# EAGLE board PT_2018_PB_4lyr_Rev1 (EAGLE 6.5.0)
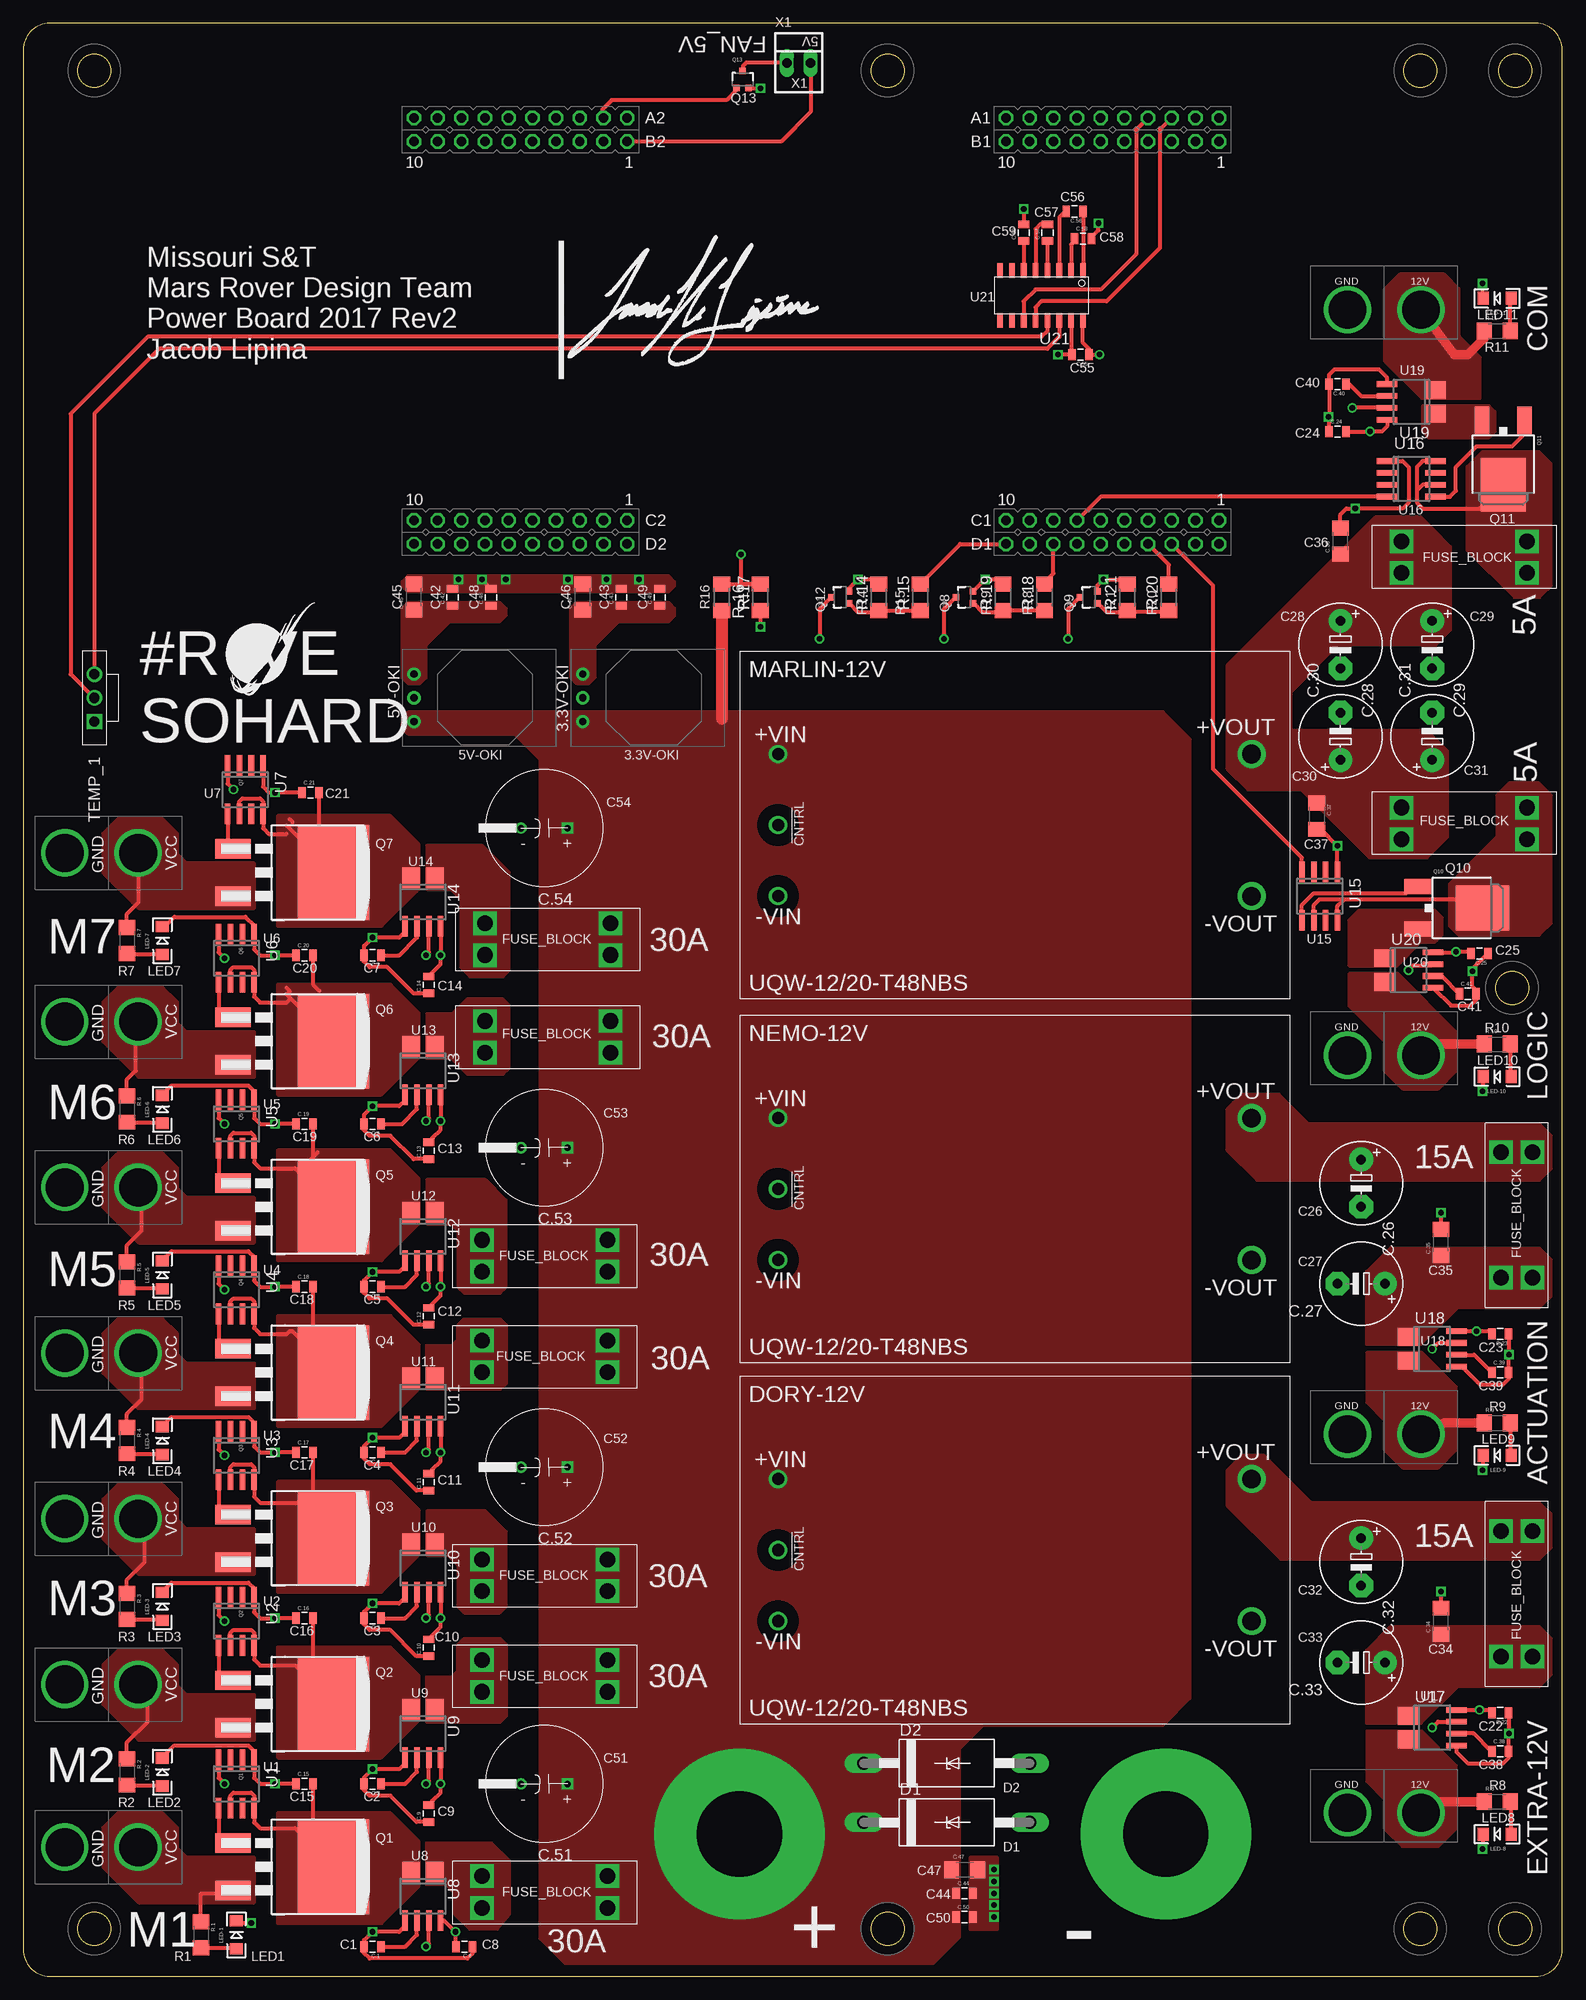
[diagram p0: board, top side]
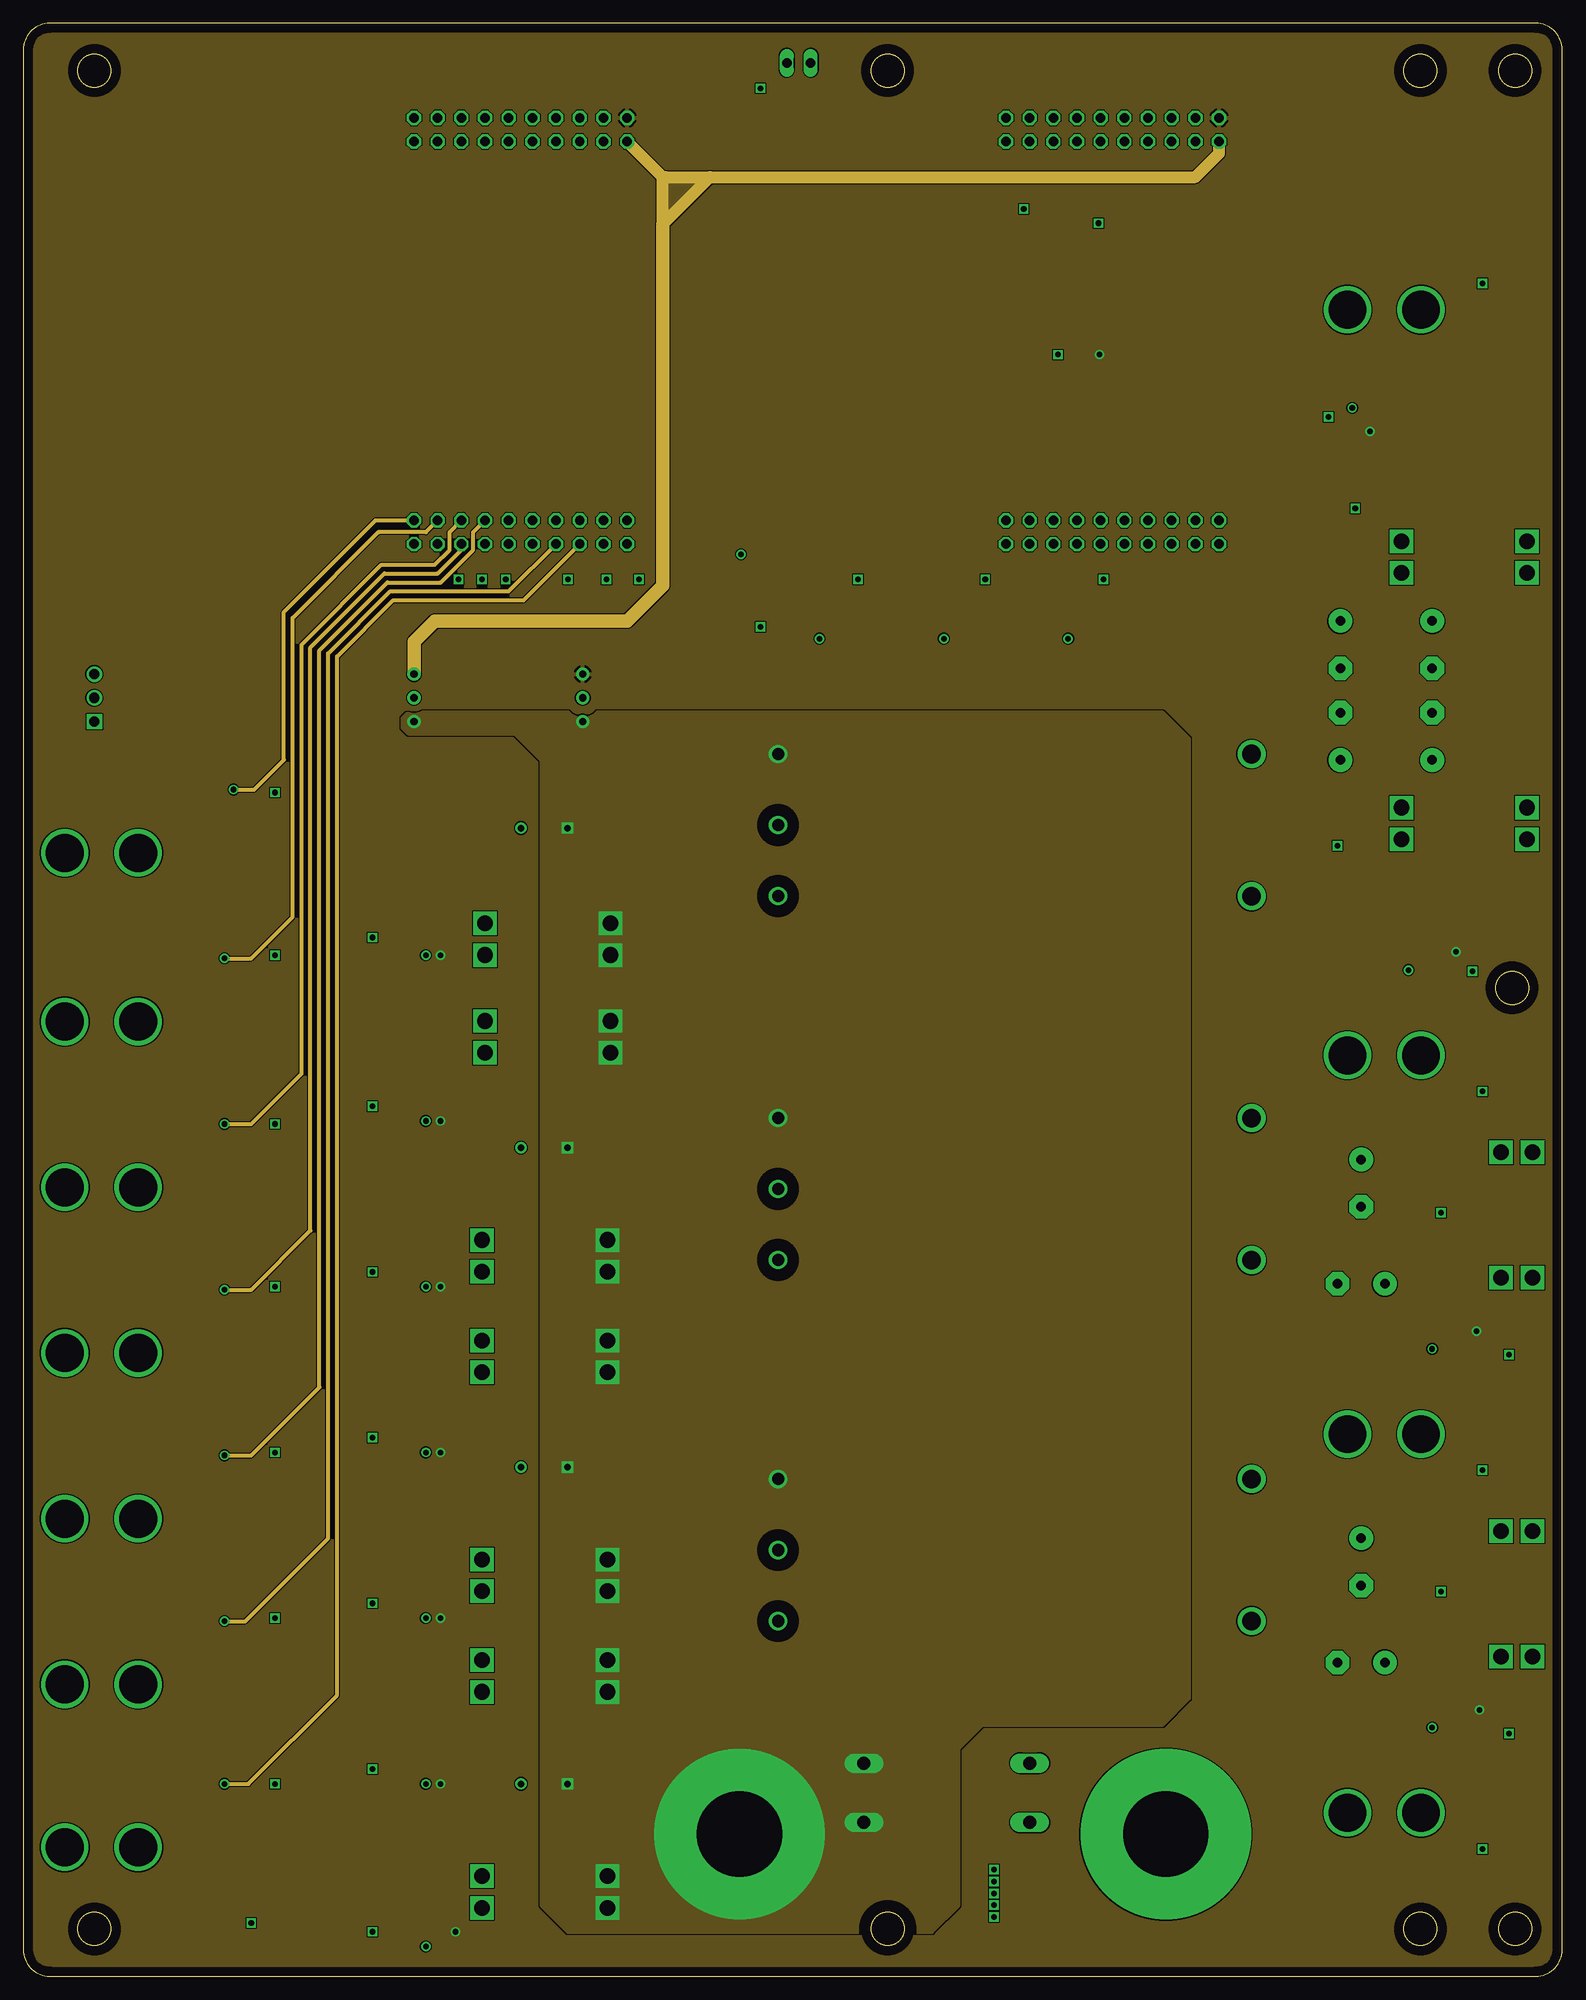
[diagram p1: board, inner layer Top-Mid(3.3)]
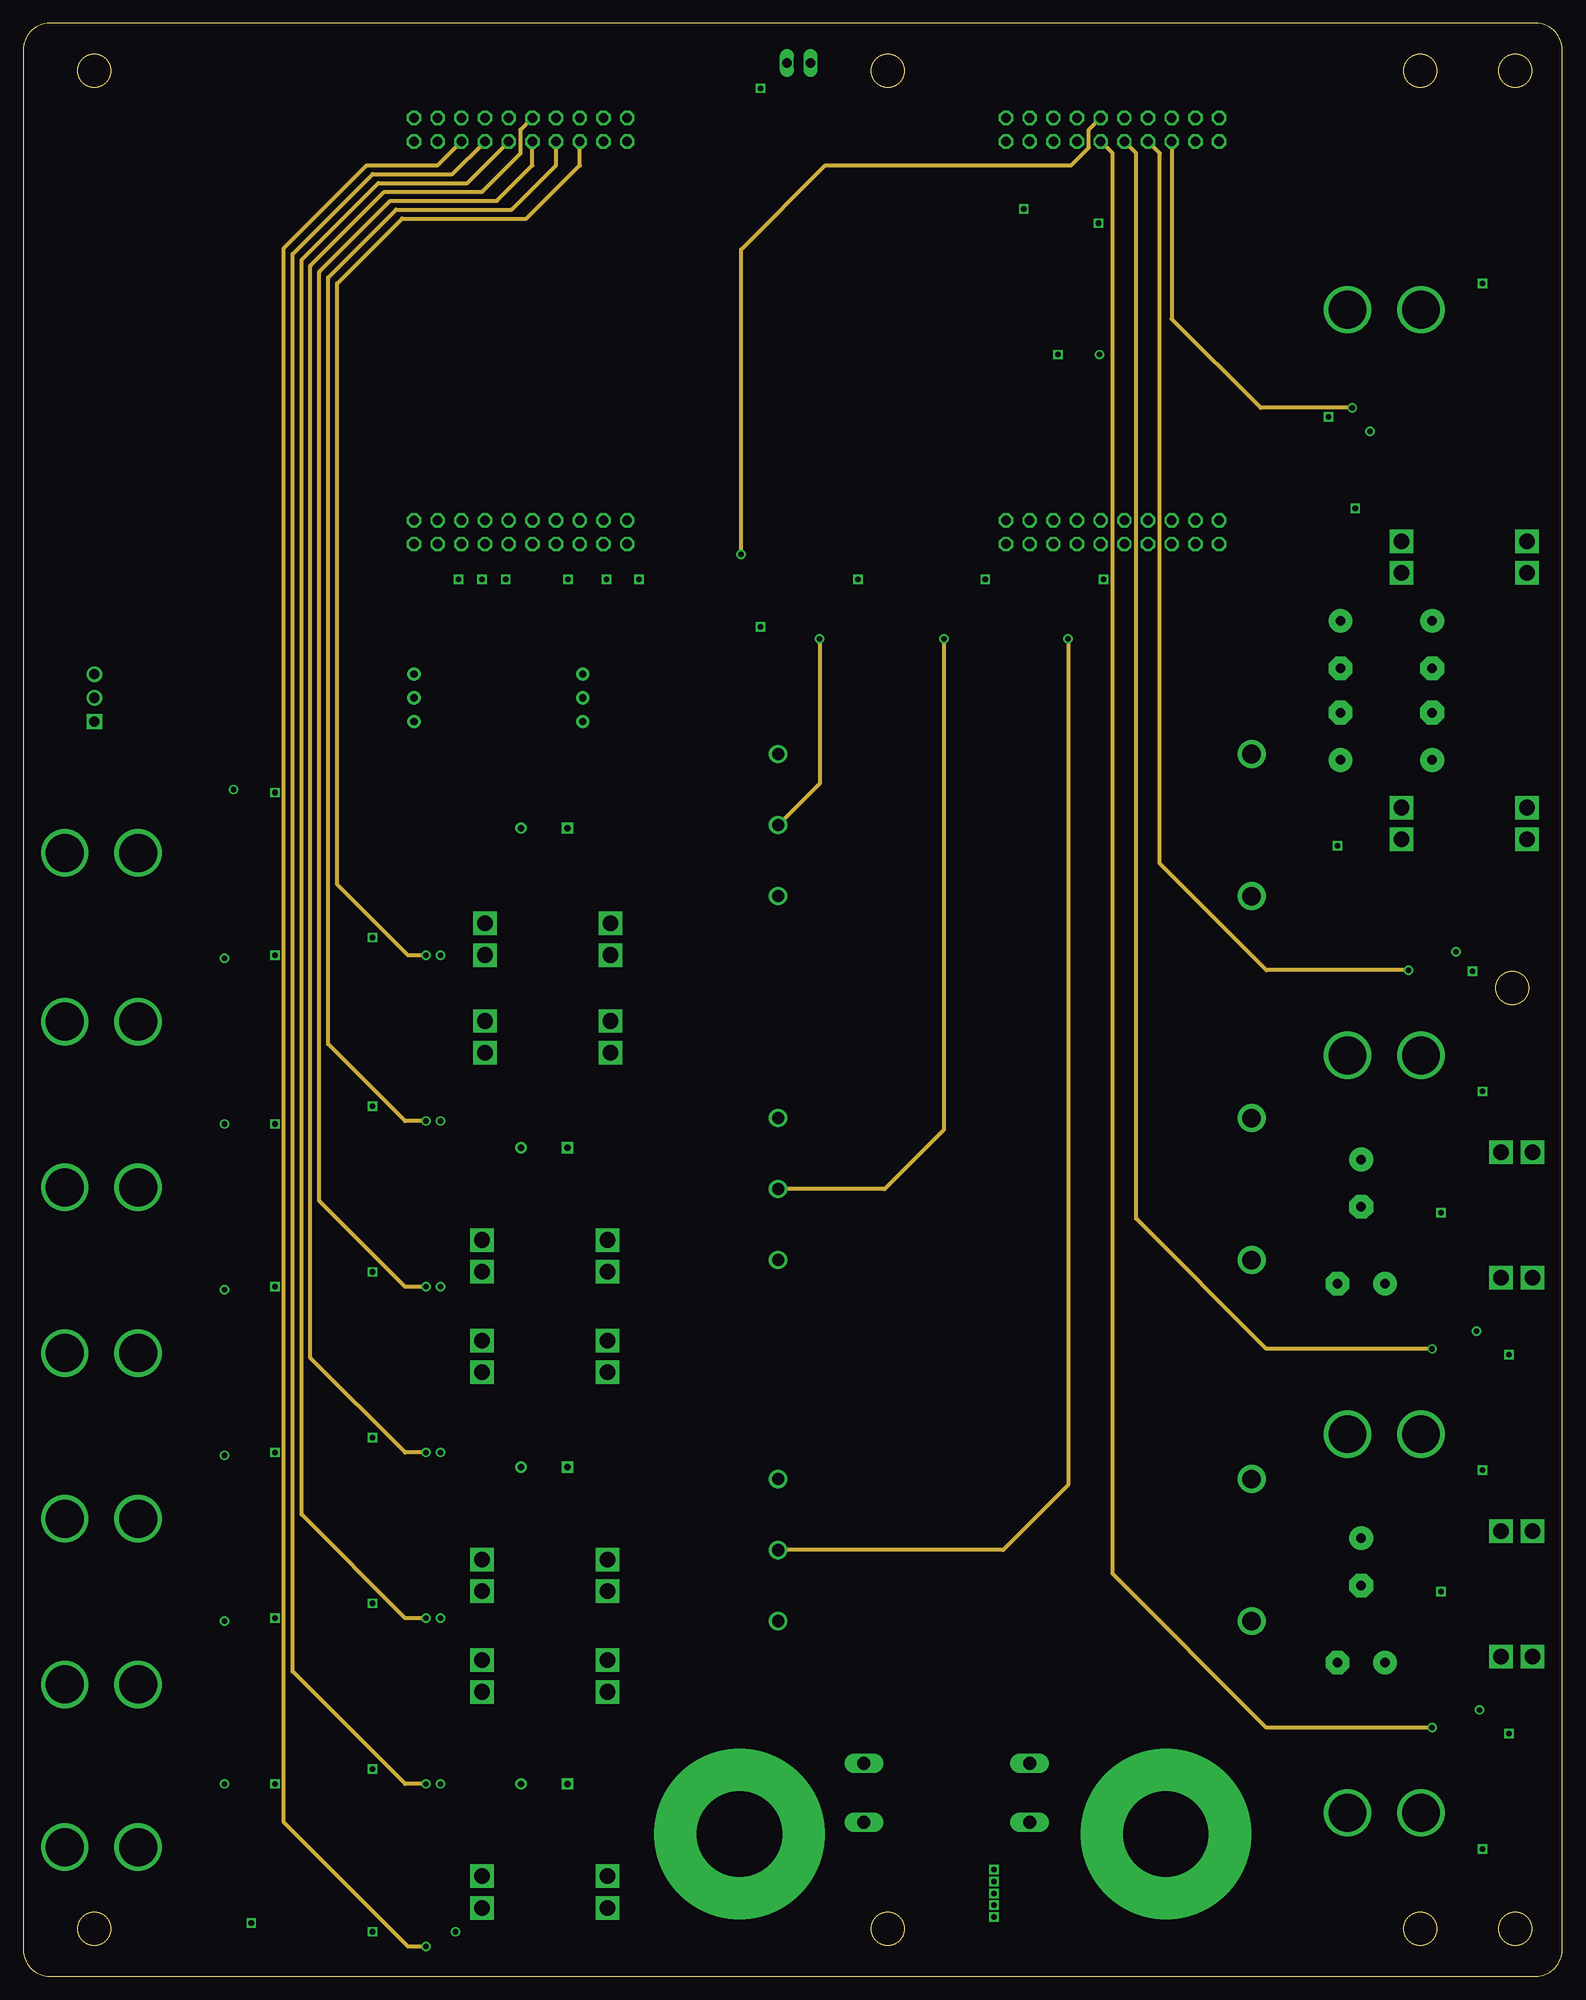
[diagram p2: board, inner layer Bot-Mid(sig)]
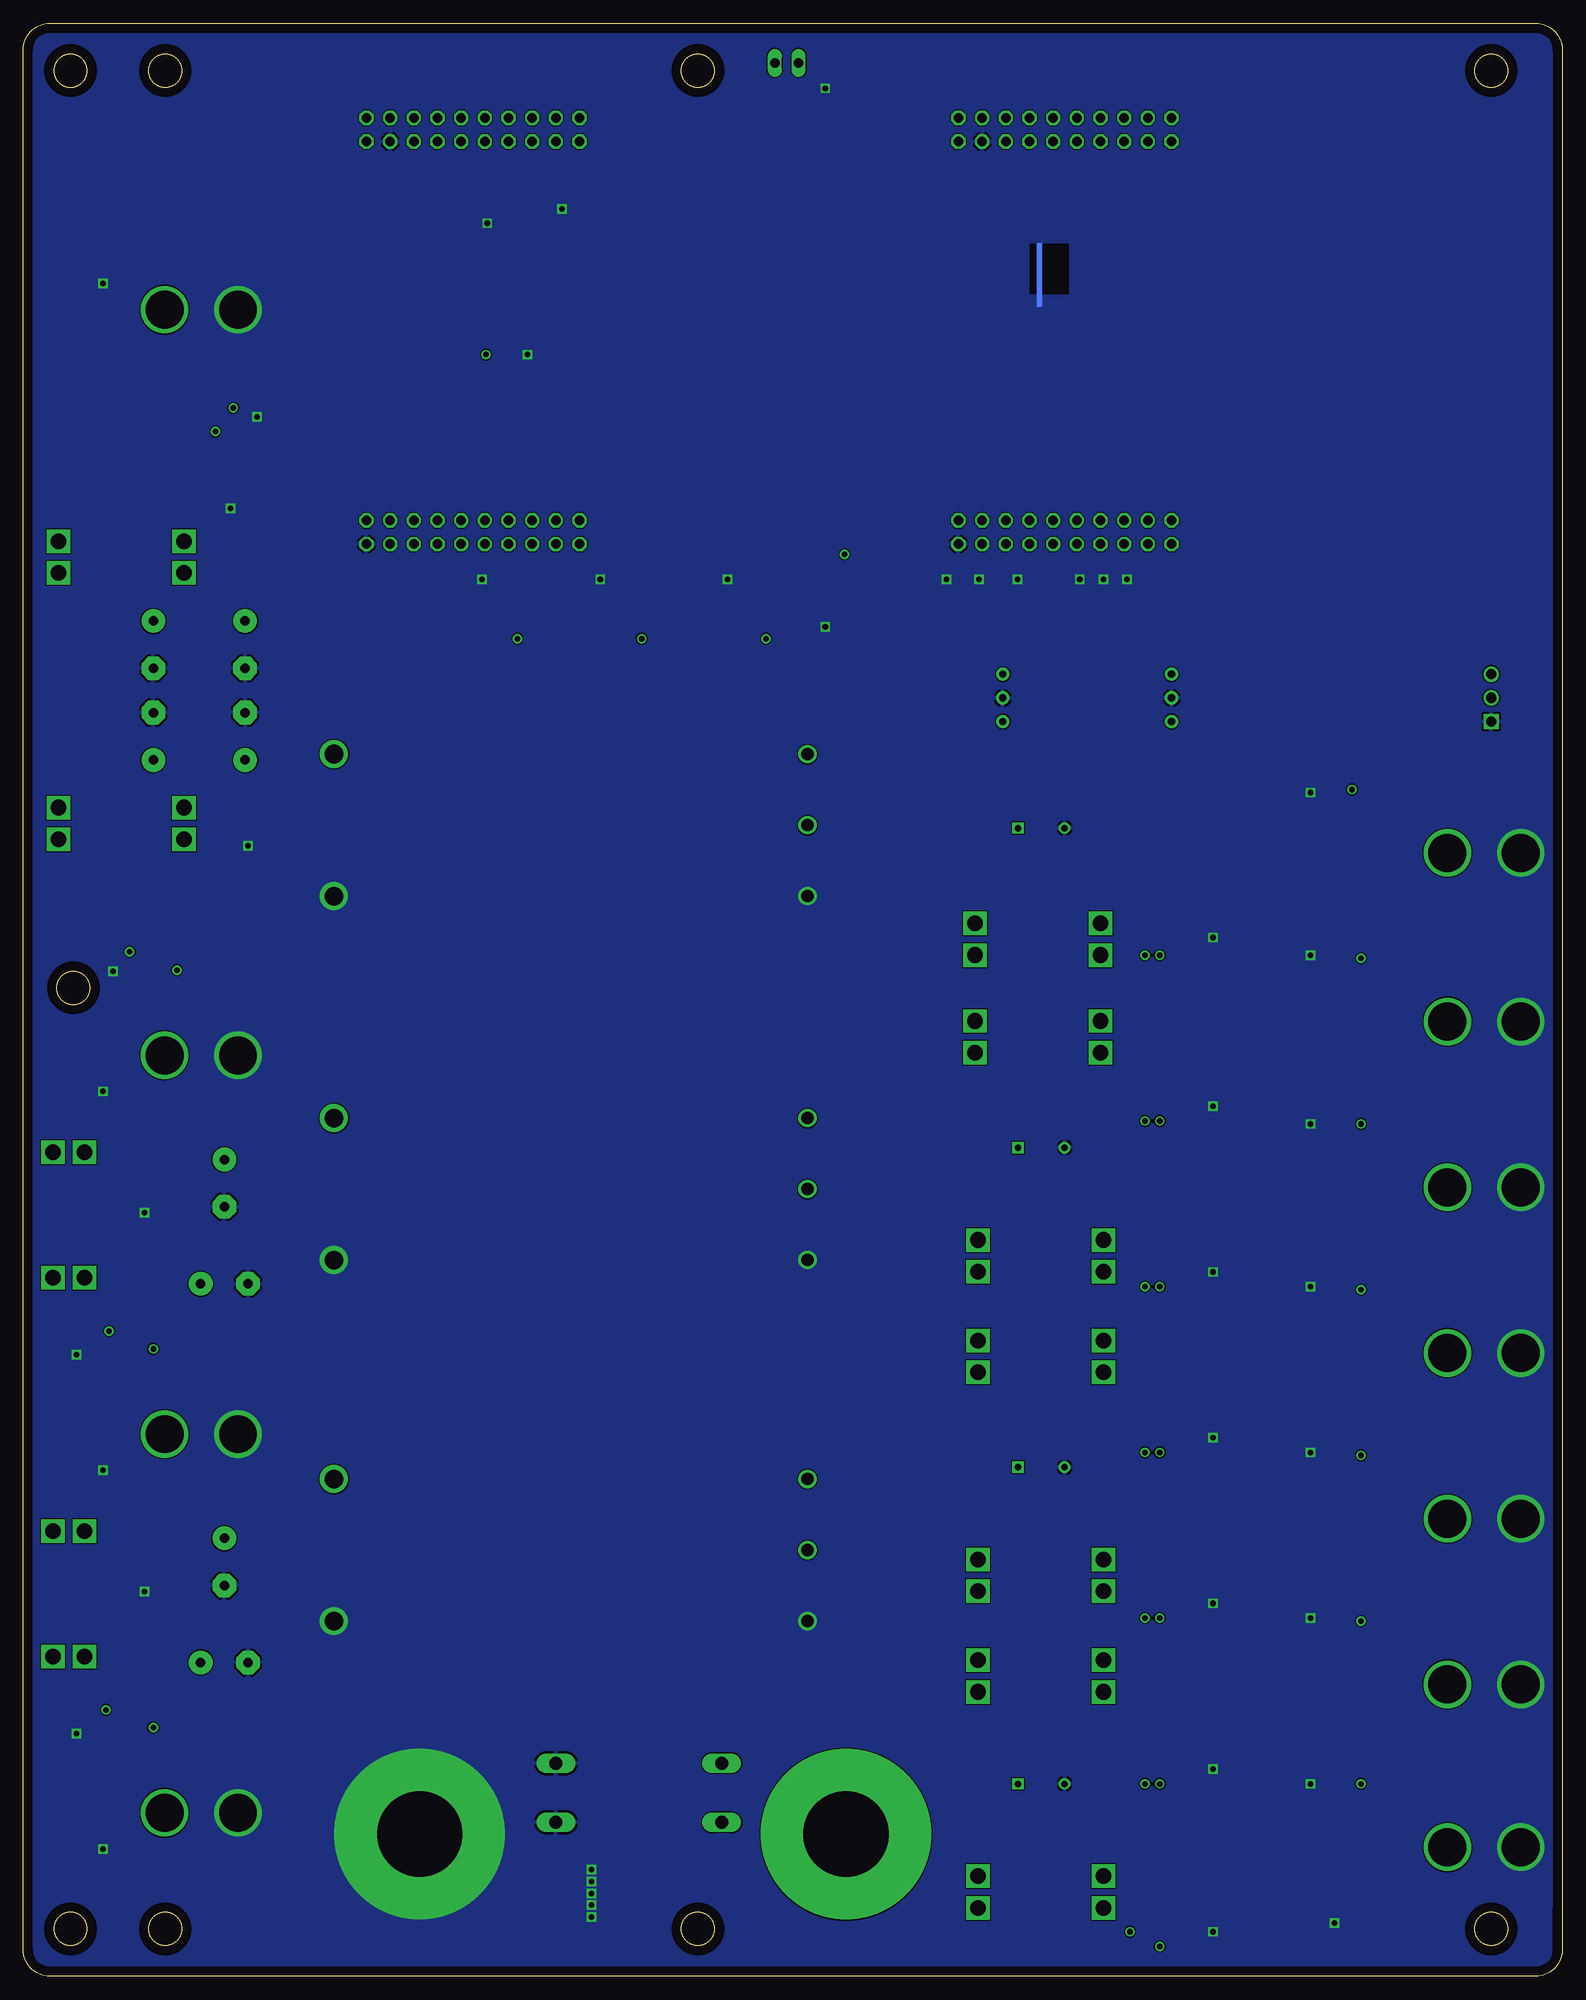
[diagram p3: board, bottom side, seen from below]

Size 165.08 x 209.54 mm. Coordinates in mm from the lower left corner, seen from the top.
Outline: 162.26,209.54 2.83,209.54 arc90 0,206.7 0,2.84 arc90 2.84,0 162.25,0 arc90 165.08,2.83 165.08,206.72 arc90 162.26,209.54
Copper layers (1*2*15*16): Top 0.035mm / dielectric 1.5mm / Top-Mid(3.3) 0.035mm / dielectric 0.15mm / Bot-Mid(sig) 0.035mm / dielectric 0.2mm / Bottom-GND 0.035mm
Design rules "advanced_circuits_standard *": minimum track width 5mil, minimum drill 10mil, track to track 5mil, track to pad 5mil, pad to pad 5mil, via to via 5mil, smd to smd 5mil, copper to edge 40mil, drill to drill 5mil, minimum pad ring 10mil, minimum via ring 8mil, stop-mask expansion 4mil, vias tented up to drill 0mil, thermal gap 10mil

## Footprints (pad centres in the part's own frame; a part is rotated, then mirrored left to right if it is on the bottom)
OKI-78SR_HORIZ = drill 0.762 pad 1.422: 1 0,0; 2 -2.54,0; 3 -5.08,0
LARGE_TERMINAL_HOLE = drill 9.144 pad 18.288: P$1 0,0
0805 = smd 0.8 x 1.2: 1 -0.9,0; 2 0.9,0
E5-8,5 = drill 1.016 pad 2.54: + -2.54,0 | drill 1.016 pad 2.54 octagon: - 2.54,0
1206 = smd 1.6 x 1.8: 1 -1.4,0; 2 1.4,0
C_12.5MM = drill 0.7 square: + -2.5,0 | drill 0.7: - 2.5,0
CB429-17 = drill 1.397 long: A 8.89,0; C -8.89,0
U-T48-QB-NO_TRIM = drill 1.3: 1 -25.4,7.62; 2 -25.4,0; 3 -25.4,-7.62 | drill 2: 4 25.4,-7.62; 8 25.4,7.62
APP45_12V_VERT_CONFIG = drill 4.064: GND 4.699,3.937; VCC 4.699,11.811
LED-1206 = smd 1.2 x 1.4: A -1.5,0; C 1.5,0
D2PACK = smd 2.083 x 3.81: 1 2.54,-4.191; 2 7.62,-4.191 | smd 10.16 x 7.62: TAB 5.08,6.604
SOT323 = smd 0.7 x 0.7: 1 -0.65,-0.925; 2 0.65,-0.925; 3 0,0.925
DPAK = smd 1.6 x 3: 1 -2.28,-5.31; 3 2.28,-5.31 | smd 4.826 x 5.715: 4 0,1.588
R1206 = smd 1.6 x 1.803: 1 -1.422,0; 2 1.422,0
MOLEX-70543-0002 = drill 1.1 square: 1 2.54,0 | drill 1.1: 2 0,0; 3 -2.54,0
SO8 = smd 0.6 x 2.2: 1 -1.905,-2.6; 2 -0.635,-2.6; 3 0.635,-2.6; 4 1.905,-2.6; 5 1.905,2.6; 6 0.635,2.6; 7 -0.635,2.6; 8 -1.905,2.6
SOIC8_ACS711 = smd 1.92 x 2.2: 1 -1.27,-2.6; 4 1.27,-2.6 | smd 0.6 x 2.2: 5 1.905,2.6; 6 0.635,2.6; 7 -0.635,2.6; 8 -1.905,2.6
SOIC16 = smd 0.6 x 1.55: 1 -4.445,-2.7; 2 -3.175,-2.7; 3 -1.905,-2.7; 4 -0.635,-2.7; 5 0.635,-2.7; 6 1.905,-2.7; 7 3.175,-2.7; 8 4.445,-2.7; 9 4.445,2.7; 10 3.175,2.7; 11 1.905,2.7; 12 0.635,2.7; 13 -0.635,2.7; 14 -1.905,2.7; 15 -3.175,2.7; 16 -4.445,2.7
TIVA-C-CONNECTED = drill 1.016 octagon: +3V3_1 59.69,54.61; +3V3_2 123.19,54.61; +5V_1 59.69,52.07; +5V_2 123.19,52.07; GND_1 57.15,52.07; GND_2 59.69,8.89; GND_3 120.65,52.07; GND_4 123.19,8.89; PA4 39.37,52.07; PA5 36.83,52.07; PA6 105.41,52.07; PA7 52.07,8.89; PB2 102.87,54.61; PB3 100.33,54.61; PB4 54.61,52.07; PB5 52.07,52.07; PC4 118.11,54.61; PC5 115.57,54.61; PC6 113.03,54.61; PC7 105.41,54.61; PD0 107.95,8.89; PD1 110.49,8.89; PD2 57.15,54.61; PD3 107.95,54.61; PD4 49.53,54.61; PD5 46.99,54.61; PD7 107.95,52.07; PE0 118.11,52.07; PE1 115.57,52.07; PE2 113.03,52.07; PE3 110.49,52.07; PE4 120.65,54.61; PE5 110.49,54.61; PF1 123.19,11.43; PF2 120.65,11.43; PF3 118.11,11.43; PG0 115.57,11.43; PG1 59.69,11.43; PH0 44.45,11.43; PH1 41.91,11.43; PH2 118.11,8.89; PH3 115.57,8.89; PK0 49.53,52.07; PK1 46.99,52.07; PK2 44.45,52.07; PK3 41.91,52.07; PK4 57.15,11.43; PK5 54.61,11.43; PK6 39.37,11.43; PK7 36.83,11.43; PL0 107.95,11.43; PL1 105.41,11.43; PL2 102.87,11.43; PL3 100.33,11.43; PL4 113.03,11.43; PL5 110.49,11.43; PM0 52.07,11.43; PM1 49.53,11.43; PM2 46.99,11.43; PM3 120.65,8.89; PM4 102.87,52.07; PM5 100.33,52.07; PM6 36.83,8.89; PM7 57.15,8.89; PN2 105.41,8.89; PN3 102.87,8.89; PN4 36.83,54.61; PN5 39.37,54.61; PP0 54.61,54.61; PP1 52.07,54.61; PP2 100.33,8.89; PP3 41.91,8.89; PP4 41.91,54.61; PP5 54.61,8.89; PQ0 44.45,54.61; PQ1 39.37,8.89; PQ2/PA3 46.99,8.89; PQ3/PA2 44.45,8.89; RST1 49.53,8.89; RST_2 113.03,8.89
APP45_MOCO_VERT_CONFIG = drill 4.064: GND 3.937,3.175; VCC 3.937,11.049
BLOCK_3557-2 = drill 1.676 square: IN_1 16.637,-1.651; IN_2 16.637,-5.055; OUT_1 3.175,-1.651; OUT_2 3.175,-5.055
22-23-2021 = drill 1 long: 1 -1.27,0; 2 1.27,0

## Placement (x,y rotation side)
3.3V-OKI  Q_OKI-78SR  [OKI-78SR_HORIZ]  60.01,134.62 270 top
5V-OKI  Q_OKI-78SR  [OKI-78SR_HORIZ]  41.91,134.62 270 top
BATT-NEG  TERMINAL_HOLE  [LARGE_TERMINAL_HOLE]  122.56,15.24 90 top
BATT-POS  TERMINAL_HOLE  [LARGE_TERMINAL_HOLE]  76.84,15.24 0 top
C.1  1nF  [0805]  37.46,3.17 180 top
C.2  1nF  [0805]  37.46,20.64 180 top
C.3  1nF  [0805]  37.46,38.42 180 top
C.4  1nF  [0805]  37.46,56.2 180 top
C.5  1nF  [0805]  37.46,73.98 180 top
C.6  1nF  [0805]  37.46,91.44 180 top
C.7  1nF  [0805]  37.46,109.54 180 top
C.8  .1µF  [0805]  47.31,3.17 180 top
C.9  .1µF  [0805]  43.5,17.46 90 top
C.10  .1µF  [0805]  43.5,35.24 90 top
C.11  .1µF  [0805]  43.5,53.02 90 top
C.12  .1µF  [0805]  43.5,70.8 90 top
C.13  .1µF  [0805]  43.5,88.58 90 top
C.14  .1µF  [0805]  43.5,106.36 90 top
C.15  .1µF  [0805]  30.16,20.64 0 top
C.16  .1µF  [0805]  30.16,38.42 0 top
C.17  .1µF  [0805]  30.16,56.2 0 top
C.18  .1µF  [0805]  30.16,73.98 0 top
C.19  .1µF  [0805]  30.16,91.44 0 top
C.20  .1µF  [0805]  30.16,109.54 0 top
C.21  .1µF  [0805]  30.8,127 0 top
C.22  .1µF  [0805]  158.43,28.26 180 top
C.23  .1µF  [0805]  158.43,68.9 180 top
C.24  .1µF  [0805]  140.97,165.74 0 top
C.25  .1µF  [0805]  156.21,109.73 180 top
C.26  330µF  [E5-8,5]  143.51,85.09 270 top
C.27  330µF  [E5-8,5]  143.51,74.3 180 top
C.28  330µF  [E5-8,5]  141.29,142.88 270 top
C.29  330µF  [E5-8,5]  151.13,142.88 270 top
C.30  330µF  [E5-8,5]  141.29,133.03 90 top
C.31  330µF  [E5-8,5]  151.13,133.03 90 top
C.32  330µF  [E5-8,5]  143.51,44.45 270 top
C.33  330µF  [E5-8,5]  143.51,33.66 180 top
C.34  2.2uF  [1206]  152.08,38.1 90 top
C.35  2.2uF  [1206]  152.08,78.74 90 top
C.36  2.2uF  [1206]  141.29,153.99 90 top
C.37  2.2uF  [1206]  138.75,124.46 270 top
C.38  1nF  [0805]  158.43,24.13 0 top
C.39  1nF  [0805]  158.43,64.77 0 top
C.40  1nF  [0805]  140.97,170.81 180 top
C.41  1nF  [0805]  154.94,105.41 0 top
C.42  1nF  [0805]  46.04,147.96 90 top
C.43  1nF  [0805]  64.14,147.96 90 top
C.44  1nF  [0805]  100.97,8.89 0 top
C.45  10uF  [1206]  41.91,147.96 90 top
C.46  10uF  [1206]  60.01,147.96 90 top
C.47  10uF  [1206]  100.97,11.43 0 top
C.48  .1uF  [0805]  50.16,147.96 90 top
C.49  .1uF  [0805]  68.26,147.96 90 top
C.50  .1uF  [0805]  100.97,6.35 0 top
C.51  1mF  [C_12.5MM]  55.88,20.64 180 top
C.52  1mF  [C_12.5MM]  55.88,54.61 180 top
C.53  1mF  [C_12.5MM]  55.88,88.9 180 top
C.54  1mF  [C_12.5MM]  55.88,123.19 180 top
C.55  .1u  [0805]  113.41,173.99 180 top
C.56  .1u  [0805]  112.78,189.36 180 top
C.57  .1u  [0805]  109.86,187.07 90 top
C.58  .1u  [0805]  113.67,186.44 0 top
C.59  .1u  [0805]  107.32,187.07 90 top
D1  1.5KE36A  [CB429-17]  99.06,16.51 0 top
D2  1.5KE36A  [CB429-17]  99.06,22.86 0 top
DORY-12V  UQW-12/20-T48NBS  [U-T48-QB-NO_TRIM]  106.36,45.72 0 top
J1  APP_2POS_CONFIG12V_VERT  [APP45_12V_VERT_CONFIG]  138.11,103.5 270 top
J2  APP_2POS_CONFIG12V_VERT  [APP45_12V_VERT_CONFIG]  138.11,183.51 270 top
J3  APP_2POS_CONFIG12V_VERT  [APP45_12V_VERT_CONFIG]  138.11,62.87 270 top
J4  APP_2POS_CONFIG12V_VERT  [APP45_12V_VERT_CONFIG]  138.11,22.23 270 top
LED-1  [LED-1206]  22.86,4.45 90 top
LED-2  [LED-1206]  14.92,21.91 90 top
LED-3  [LED-1206]  14.92,39.69 90 top
LED-4  [LED-1206]  14.92,57.47 90 top
LED-5  [LED-1206]  14.92,75.25 90 top
LED-6  [LED-1206]  14.92,93.03 90 top
LED-7  [LED-1206]  14.92,111.12 90 top
LED-8  [LED-1206]  158.11,15.24 180 top
LED-9  [LED-1206]  158.11,55.88 180 top
LED-10  [LED-1206]  158.11,96.52 180 top
LED-11  [LED-1206]  158.11,180.02 180 top
MARLIN-12V  UQW-12/20-T48NBS  [U-T48-QB-NO_TRIM]  106.36,123.51 0 top
NEMO-12V  UQW-12/20-T48NBS  [U-T48-QB-NO_TRIM]  106.36,84.45 0 top
Q1  Q_IRFS7437PbF  [D2PACK]  26.67,16.83 270 top
Q2  Q_IRFS7437PbF  [D2PACK]  26.67,34.29 270 top
Q3  Q_IRFS7437PbF  [D2PACK]  26.67,52.07 270 top
Q4  Q_IRFS7437PbF  [D2PACK]  26.67,69.85 270 top
Q5  Q_IRFS7437PbF  [D2PACK]  26.67,87.63 270 top
Q6  Q_IRFS7437PbF  [D2PACK]  26.67,105.41 270 top
Q7  Q_IRFS7437PbF  [D2PACK]  26.67,123.51 270 top
Q8  2N7002  [SOT323]  100.97,147.96 90 top
Q9  2N7002  [SOT323]  114.3,147.96 90 top
Q10  MOSFET-NCHANNELFDD8780  [DPAK]  154.94,114.62 270 top
Q11  MOSFET-NCHANNELFDD8780  [DPAK]  158.75,161.61 180 top
Q12  2N7002  [SOT323]  87.63,147.96 90 top
Q13  2N7002PW  [SOT323]  77.15,203.52 0 top
R.1  5kΩ  [1206]  19.05,4.45 270 top
R.2  5kΩ  [1206]  11.11,21.91 270 top
R.3  5kΩ  [1206]  11.11,39.69 270 top
R.4  5kΩ  [1206]  11.11,57.47 270 top
R.5  5kΩ  [1206]  11.11,75.25 270 top
R.6  5kΩ  [1206]  11.11,93.03 270 top
R.7  5kΩ  [1206]  11.11,111.12 270 top
R.8  1kΩ  [1206]  158.11,18.73 0 top
R.9  1kΩ  [1206]  158.11,59.37 0 top
R.10  1kΩ  [1206]  158.11,100.01 0 top
R.11  1kΩ  [1206]  158.11,176.53 0 top
R.14  100k  [R1206]  91.76,147.96 90 top
R.15  1k  [R1206]  96.2,147.96 90 top
R.16  100k 1%  [R1206]  74.93,147.96 270 top
R.17  10kΩ 1%  [R1206]  79.06,147.96 90 top
R.18  1k  [R1206]  109.54,147.96 90 top
R.19  100k  [R1206]  105.09,147.96 90 top
R.20  1k  [R1206]  122.87,147.96 90 top
R.21  100k  [R1206]  118.43,147.96 90 top
TEMP_1  SL03  [MOLEX-70543-0002]  7.62,137.16 270 top
U1  LT1910  [SO8]  22.86,20.64 180 top
U2  LT1910  [SO8]  22.86,38.1 180 top
U3  LT1910  [SO8]  22.86,55.88 180 top
U4  LT1910  [SO8]  22.86,73.66 180 top
U5  LT1910  [SO8]  22.86,91.44 180 top
U6  LT1910  [SO8]  22.86,109.22 180 top
U7  LT1910  [SO8]  23.81,127.32 180 top
U8  ACS722LLCTR-40AU-T  [SOIC8_ACS711]  42.86,8.57 180 top
U9  ACS722LLCTR-40AU-T  [SOIC8_ACS711]  42.86,26.04 180 top
U10  ACS722LLCTR-40AU-T  [SOIC8_ACS711]  42.86,43.81 180 top
U11  ACS722LLCTR-40AU-T  [SOIC8_ACS711]  42.86,61.59 180 top
U12  ACS722LLCTR-40AU-T  [SOIC8_ACS711]  42.86,79.38 180 top
U13  ACS722LLCTR-40AU-T  [SOIC8_ACS711]  42.86,97.16 180 top
U14  ACS722LLCTR-40AU-T  [SOIC8_ACS711]  42.86,115.25 180 top
U15  LT1910  [SO8]  139.06,115.89 180 top
U16  LT1910  [SO8]  148.91,160.66 270 top
U17  ACS722LLCTR-40AU-T  [SOIC8_ACS711]  151.13,26.67 270 top
U18  ACS722LLCTR-40AU-T  [SOIC8_ACS711]  151.13,67.31 270 top
U19  ACS722LLCTR-40AU-T  [SOIC8_ACS711]  148.91,168.91 90 top
U20  ACS722LLCTR-40AU-T  [SOIC8_ACS711]  148.59,107.95 270 top
U21  MAX3232D  [SOIC16]  109.22,180.34 180 top
U$1  TIVA-C-CONNECTED  [TIVA-C-CONNECTED]  5.08,144.78 0 top
U$2  JACOB_SIG  [JACOB_SIG]  56.71,170.05 0 top
U$3  APP_2POS_CONFIGMOCO_VERT  [APP45_MOCO_VERT_CONFIG]  1.27,17.78 270 top
U$5  MOUNTING_HOLE#6  [#6_SCREW]  160.02,5.08 0 top
U$7  APP_2POS_CONFIGMOCO_VERT  [APP45_MOCO_VERT_CONFIG]  1.27,53.02 270 top
U$8  MOUNTING_HOLE#6  [#6_SCREW]  149.86,204.47 0 top
U$9  MOUNTING_HOLE#6  [#6_SCREW]  159.7,106.05 0 top
U$10  MOUNTING_HOLE#6  [#6_SCREW]  7.62,204.47 0 top
U$14  ATC_FUSE_BLOCK  [BLOCK_3557-2]  156.84,31.11 90 top
U$15  APP_2POS_CONFIGMOCO_VERT  [APP45_MOCO_VERT_CONFIG]  1.27,70.8 270 top
U$16  MOUNTING_HOLE#6  [#6_SCREW]  160.02,204.47 0 top
U$19  APP_2POS_CONFIGMOCO_VERT  [APP45_MOCO_VERT_CONFIG]  1.27,88.58 270 top
U$20  APP_2POS_CONFIGMOCO_VERT  [APP45_MOCO_VERT_CONFIG]  1.27,106.36 270 top
U$22  APP_2POS_CONFIGMOCO_VERT  [APP45_MOCO_VERT_CONFIG]  1.27,124.46 270 top
U$23  APP_2POS_CONFIGMOCO_VERT  [APP45_MOCO_VERT_CONFIG]  1.27,35.24 270 top
U$26  ATC_FUSE_BLOCK  [BLOCK_3557-2]  46.04,12.38 0 top
U$27  ATC_FUSE_BLOCK  [BLOCK_3557-2]  46.04,35.56 0 top
U$28  ATC_FUSE_BLOCK  [BLOCK_3557-2]  46.35,114.62 0 top
U$29  ATC_FUSE_BLOCK  [BLOCK_3557-2]  46.35,104.14 0 top
U$30  ATC_FUSE_BLOCK  [BLOCK_3557-2]  156.84,71.75 90 top
U$31  ATC_FUSE_BLOCK  [BLOCK_3557-2]  164.47,148.91 180 top
U$32  ATC_FUSE_BLOCK  [BLOCK_3557-2]  164.47,120.33 180 top
U$34  MOUNTING_HOLE#6  [#6_SCREW]  92.71,5.08 0 top
U$35  MOUNTING_HOLE#6  [#6_SCREW]  92.71,204.47 0 top
U$36  ATC_FUSE_BLOCK  [BLOCK_3557-2]  46.04,46.35 0 top
U$37  ATC_FUSE_BLOCK  [BLOCK_3557-2]  46.04,69.85 0 top
U$38  ATC_FUSE_BLOCK  [BLOCK_3557-2]  46.04,80.64 0 top
U$39  MOUNTING_HOLE#6  [#6_SCREW]  7.62,5.08 0 top
U$40  MOUNTING_HOLE#6  [#6_SCREW]  149.86,5.08 0 top
U$41  MRDT_LOGO  [MRDT_LOGO]  21.72,136.59 0 top
X1  22-23-2021  [22-23-2021]  83.19,205.3 0 top

## Library data of the parts
3.3V-OKI 5V-OKI BATT-NEG BATT-POS DORY-12V MARLIN-12V NEMO-12V Q1-Q7 U8-U14 U17-U20 = MRDT-2015-PowerBoard
C.1-C.25 C.34-C.50 = SparkFun-Capacitors
C.26-C.33 R.14-R.21 = resistor
C.51-C.54 = MRDT-2014-All
C.55-C.59 R.1-R.11 = SparkFun-Passives
D1 D2 = diode
J1-J4 = MRDT-Connectors; COLOR1: YELLOW; COLOR2: BLACK
LED-1-LED-11 = SparkFun-LED
Q8 Q9 Q12 Q13 = SparkFun-DiscreteSemi; PROD_ID: TRANS-11151
Q10 Q11 = SparkFun-DiscreteSemi; PROD_ID: TRANS-09984
TEMP_1 = MRDT-Connectors
U1-U7 U15 U16 = Jake
U21 = MRDT-ICs; OPERATING_VOLTAGE: 3V3
U$1 U$41 = MRDT-2015-General
U$2 = Jacob Signature
U$3 U$7 U$15 U$19 U$20 U$22 U$23 = MRDT-Connectors; COLOR2: BLACK
U$5 U$8-U$10 U$14 U$16 U$26-U$32 U$34-U$40 = MRDT-Hardware
X1 = con-molex; MF: MOLEX; MPN: 22-23-2021; OC_FARNELL: 1462926; OC_NEWARK: 25C3832

## Nets
3.3V: 3.3V-OKI.3 C.8.2 C.9.2 C.10.2 C.11.2 C.12.2 C.13.2 C.14.2 C.22.2 C.23.2 C.24.2 C.25.2 C.43.1 C.46.1 C.49.1 C.55.1 U8.8 U9.8 U10.8 U11.8 U12.8 U13.8 U14.8 U17.8 U18.8 U19.8 U20.8 U21.16 U$1.+3V3_1 U$1.+3V3_2
5V: 5V-OKI.3 C.42.1 C.45.1 C.48.1 U$1.+5V_1 U$1.+5V_2 X1.2
12V-AUX-ACT: J3.VCC R.9.1 U18.4
12V-AUX-COM: J1.VCC R.10.1 U20.4
12V-AUX-EXTRA: J4.VCC R.8.1 U17.4
12V-AUX-LOGIC: J2.VCC R.11.1 U19.4
232_RX: TEMP_1.2 U21.13
232_TX: TEMP_1.3 U21.14
ACT-CTL: R.18.2 U$1.PN2
COM-SIG: U16.4 U$1.PL0
COM/LOGIC-CTL: R.15.2 U$1.PP2
DRAIN-M1: C.15.2 Q1.TAB U1.6 U1.8 U8.4
DRAIN-M2: C.16.2 Q2.TAB U2.6 U2.8 U9.4
DRAIN-M3: C.17.2 Q3.TAB U3.6 U3.8 U10.4
DRAIN-M4: C.18.2 Q4.TAB U4.6 U4.8 U11.4
DRAIN-M5: C.19.2 Q5.TAB U5.6 U5.8 U12.4
DRAIN-M6: C.20.2 Q6.TAB U6.6 U6.8 U13.4
DRAIN-M7: C.21.2 Q7.TAB U7.6 U7.8 U14.4
EXTRA-CTL: R.20.2 U$1.PH3
FAN_CTL_1: Q13.1 U$1.PD2
FILTER-M1: C.1.1 U8.6
FILTER-M2: C.2.1 U9.6
FILTER-M3: C.3.1 U10.6
FILTER-M4: C.4.1 U11.6
FILTER-M5: C.5.1 U12.6
FILTER-M6: C.6.1 U13.6
FILTER-M7: C.7.1 U14.6
GATE-M1: Q1.1 U1.5
GATE-M2: Q2.1 U2.5
GATE-M3: Q3.1 U3.5
GATE-M4: Q4.1 U4.5
GATE-M5: Q5.1 U5.5
GATE-M6: Q6.1 U6.5
GATE-M7: Q7.1 U7.5
GND: 3.3V-OKI.2 5V-OKI.2 BATT-NEG.P$1 C.1.2 C.2.2 C.3.2 C.4.2 C.5.2 C.6.2 C.7.2 C.8.1 C.9.1 C.10.1 C.11.1 C.12.1 C.13.1 C.14.1 C.15.1 C.16.1 C.17.1 C.18.1 C.19.1 C.20.1 C.21.1 C.22.1 C.23.1 C.24.1 C.25.1 C.26.- C.27.- C.28.- C.29.- C.30.- C.31.- C.32.- C.33.- C.34.2 C.35.2 C.36.2 C.37.2 C.38.2 C.39.2 C.40.2 C.41.2 C.42.2 C.43.2 C.44.2 C.45.2 C.46.2 C.47.2 C.48.2 C.49.2 C.50.2 C.51.- C.52.- C.53.- C.54.- C.55.2 C.58.2 C.59.2 D1.A D2.A DORY-12V.3 DORY-12V.4 J1.GND J2.GND J3.GND J4.GND LED-1.C LED-2.C LED-3.C LED-4.C LED-5.C LED-6.C LED-7.C LED-8.C LED-9.C LED-10.C LED-11.C MARLIN-12V.3 MARLIN-12V.4 NEMO-12V.3 NEMO-12V.4 Q8.2 Q9.2 Q12.2 Q13.2 R.14.2 R.17.1 R.19.2 R.21.2 TEMP_1.1 U1.1 U2.1 U3.1 U4.1 U5.1 U6.1 U7.1 U8.5 U9.5 U10.5 U11.5 U12.5 U13.5 U14.5 U15.1 U16.1 U17.5 U18.5 U19.5 U20.5 U21.15 U$1.GND_1 U$1.GND_2 U$1.GND_3 U$1.GND_4 U$3.GND U$7.GND U$15.GND U$19.GND U$20.GND U$22.GND U$23.GND
IMEAS-ACT: U18.7 U$1.PE2
IMEAS-COM: U19.7 U$1.PE0
IMEAS-EXTRA: U17.7 U$1.PE3
IMEAS-LOGIC: U20.7 U$1.PE1
IMEAS-M1: U8.7 U$1.PK3
IMEAS-M2: U9.7 U$1.PK2
IMEAS-M3: U10.7 U$1.PK1
IMEAS-M4: U11.7 U$1.PD4
IMEAS-M5: U12.7 U$1.PK0
IMEAS-M6: U13.7 U$1.PB5
IMEAS-M7: U14.7 U$1.PB4
LEDLINE-M1: LED-1.A R.1.2
LEDLINE-M2: LED-2.A R.2.2
LEDLINE-M3: LED-3.A R.3.2
LEDLINE-M4: LED-4.A R.4.2
LEDLINE-M5: LED-5.A R.5.2
LEDLINE-M6: LED-6.A R.6.2
LEDLINE-M7: LED-7.A R.7.2
LOGIC-SIG: U15.4 U$1.PH2
N$1: C.26.+ NEMO-12V.8 U$30.IN_1 U$30.IN_2
N$2: C.33.+ C.34.1 U17.1 U$14.OUT_1 U$14.OUT_2
N$3: MARLIN-12V.2 Q12.3
N$4: C.41.1 U20.6
N$5: DORY-12V.2 Q9.3
N$6: LED-9.A R.9.2
N$7: LED-11.A R.11.2
N$8: NEMO-12V.2 Q8.3
N$9: C.28.+ C.29.+ C.30.+ C.31.+ C.36.1 C.37.1 MARLIN-12V.8 U$31.IN_1 U$31.IN_2 U$32.IN_1 U$32.IN_2
N$10: C.38.1 U17.6
N$11: C.58.1 U21.2
N$12: C.39.1 U18.6
N$15: C.40.1 U19.6
N$16: LED-10.A R.10.2
N$17: Q11.1 U16.5
N$18: C.27.+ C.35.1 U18.1 U$30.OUT_1 U$30.OUT_2
N$19: Q11.3 U19.1
N$20: Q11.4 U16.6 U16.8 U$31.OUT_1 U$31.OUT_2
N$21: Q10.4 U15.6 U15.8 U$32.OUT_1 U$32.OUT_2
N$22: Q10.3 U20.1
N$23: C.32.+ DORY-12V.8 U$14.IN_1 U$14.IN_2
N$25: Q8.1 R.18.1 R.19.1
N$27: Q9.1 R.20.1 R.21.1
N$28: Q10.1 U15.5
N$40: C.56.1 U21.1
N$42: C.56.2 U21.3
N$43: C.57.1 U21.4
N$44: C.57.2 U21.5
N$45: C.59.1 U21.6
N$46: LED-8.A R.8.2
N$66: Q13.3 X1.1
N$114: Q12.1 R.14.1 R.15.1
SER_RX: U21.12 U$1.PC4
SER_TX: U21.11 U$1.PC5
SIG-M1: U1.4 U$1.PP5
SIG-M2: U2.4 U$1.PA7
SIG-M3: U3.4 U$1.PH0
SIG-M4: U4.4 U$1.PP3
SIG-M5: U5.4 U$1.PH1
SIG-M6: U6.4 U$1.PK6
SIG-M7: U7.4 U$1.PK7
SOURCE-M1: Q1.2 R.1.1 U$3.VCC
SOURCE-M2: Q2.2 R.2.1 U$23.VCC
SOURCE-M3: Q3.2 R.3.1 U$7.VCC
SOURCE-M4: Q4.2 R.4.1 U$15.VCC
SOURCE-M5: Q5.2 R.5.1 U$19.VCC
SOURCE-M6: Q6.2 R.6.1 U$20.VCC
SOURCE-M7: Q7.2 R.7.1 U$22.VCC
V_BATT: 3.3V-OKI.1 5V-OKI.1 BATT-POS.P$1 C.44.1 C.47.1 C.50.1 C.51.+ C.52.+ C.53.+ C.54.+ D1.C D2.C DORY-12V.1 MARLIN-12V.1 NEMO-12V.1 R.16.2 U$26.IN_1 U$26.IN_2 U$27.IN_1 U$27.IN_2 U$28.IN_1 U$28.IN_2 U$29.IN_1 U$29.IN_2 U$36.IN_1 U$36.IN_2 U$37.IN_1 U$37.IN_2 U$38.IN_1 U$38.IN_2
V_BATT_M1: U8.1 U$26.OUT_1 U$26.OUT_2
V_BATT_M2: U9.1 U$27.OUT_1 U$27.OUT_2
V_BATT_M3: U10.1 U$36.OUT_1 U$36.OUT_2
V_BATT_M4: U11.1 U$37.OUT_1 U$37.OUT_2
V_BATT_M5: U12.1 U$38.OUT_1 U$38.OUT_2
V_BATT_M6: U13.1 U$29.OUT_1 U$29.OUT_2
V_BATT_M7: U14.1 U$28.OUT_1 U$28.OUT_2
VMEAS-VBATT: R.16.1 R.17.2 U$1.PE5

## Tracks (layer width: path | path; a pad name or v marks a point on that pad's centre or on a via)
3.3V  (via drill 0.6)
  Top 0.406: C.24.2 v144.46,165.74 145.73,165.74 146.31,166.31 U19.8 | U8.8 45.14,5.97 v46.35,4.76 46.41,4.71 C.8.2 | C.9.2 43.95,18.86 44.77,19.68 v44.77,20.64 U9.8 | C.10.2 43.95,36.64 44.77,37.47 v44.77,38.42 U10.8 | C.11.2 43.95,54.42 44.77,55.24 v44.77,56.2 U11.8 | C.12.2 43.95,72.2 44.77,73.03 v44.77,73.98 U12.8 | C.13.2 43.95,89.98 44.77,90.81 v44.77,91.76 U13.8 | C.14.2 43.95,107.76 44.77,108.58 v44.77,109.54 U14.8 | U21.16 113.67,175.26 114.31,174.61 C.55.1 v115.44,173.99 | U17.8 v156.21,28.57 157.53,28.57 C.22.2 | U18.8 v155.89,69.22 157.22,69.22 C.23.2 | U20.8 153.61,109.86 v153.67,109.92 155.12,109.92 C.25.2
  pour Top-Mid(3.3) (rank 2): 165.73,210.82 -5.4,210.82 -5.4,-3.81 165.73,-3.81
  pour Top (no thermals): 69.22,147.32 59.37,147.32 58.74,146.69 58.74,139.38 59.37,138.75 60.64,138.75 61.28,139.38 61.28,142.88 63.82,145.41 69.22,145.41 69.85,146.05 69.85,146.69
5V
  Top 0.406: X1.2 84.46,200.03 81.28,196.85 U$1.+5V_1
  Top-Mid(3.3) 1.27: U$1.+5V_1 68.58,193.04 68.9,193.04 | 68.9,193.04 73.66,193.04 | 73.66,193.04 68.58,187.96 68.58,192.72 68.9,193.04 | 73.66,193.04 125.73,193.04 128.27,195.58 U$1.+5V_2
  Top-Mid(3.3) 1.422: 68.58,187.96 68.58,149.22 64.77,145.41 44.13,145.41 41.91,143.19 5V-OKI.3
  pour Top-Mid(3.3): 68.58,193.04 73.66,193.04 68.58,187.96
  pour Top (no thermals): 51.12,147.32 41.27,147.32 40.64,146.69 40.64,139.38 41.27,138.75 42.55,138.75 43.18,139.38 43.18,142.88 45.72,145.41 51.12,145.41 51.75,146.05 51.75,146.69
12V-AUX-ACT
  Top 1.016: R.9.1 152.4,59.37 J3.VCC
  pour Top (no thermals): 149.99,66.87 144.14,66.87 144.14,61.59 146.05,59.69 146.05,56.52 147.95,54.61 151.76,54.61 153.67,56.52 153.67,63.18
12V-AUX-COM
  Top 1.016: R.10.1 151.83,100.01 149.86,99.06 149.86,98.87 J1.VCC
  pour Top (no thermals): 147.45,107.51 142.24,107.51 142.24,104.14 146.05,100.33 146.05,97.16 147.95,95.25 151.76,95.25 153.67,97.16 153.67,101.28
12V-AUX-EXTRA
  Top 1.016: R.8.1 151.76,18.73 J4.VCC
  pour Top (no thermals): 149.99,26.23 144.14,26.23 144.14,20.95 146.05,19.05 146.05,15.88 147.95,13.97 151.76,13.97 153.67,15.88 153.67,22.54
12V-AUX-LOGIC
  Top 1.016: R.11.1 156.72,175.76 154.94,173.99 153.48,173.99 J2.VCC
  pour Top (no thermals): 150.05,169.35 156.21,169.35 156.21,173.67 153.99,175.9 153.99,180.97 152.4,182.56 147.64,182.56 146.05,180.97 146.05,173.35
232_RX
  Top 0.406: U21.13 109.86,176.53 109.22,175.9 13.34,175.9 5.08,167.64 5.08,139.7 TEMP_1.2
232_TX
  Top 0.406: U21.14 111.12,175.9 109.86,174.62 14.61,174.62 7.62,167.64 TEMP_1.3
ACT-CTL
  Top 0.406: R.18.2 109.54,149.54 110.49,150.5 U$1.PN2
COM-SIG
  Top 0.406: U16.4 115.57,158.75 U$1.PL0
COM/LOGIC-CTL
  Top 0.406: R.15.2 100.5,153.67 U$1.PP2
DRAIN-M1
  Top 0.406: U1.6 22.22,19.37 22.54,19.68 24.45,19.68 24.77,19.37 U1.8 24.77,16.51 25.4,15.88 29.15,15.88 31.06,13.96 | Q1.TAB 31.4,13.62 31.06,13.96 | C.15.2 31.06,13.96
  pour Top (no thermals): 39.37,17.46 27.3,17.46 27.3,5.71 38.42,5.71 42.42,9.72 42.42,14.41
DRAIN-M2
  Top 0.406: U2.6 22.22,36.83 22.54,37.15 24.45,37.15 24.77,36.83 U2.8 24.77,33.97 25.4,33.34 29.15,33.34 31.06,31.42 | Q2.TAB 31.24,31.24 31.06,31.42 | C.16.2 31.06,31.42
  pour Top (no thermals): 39.37,35.24 27.3,35.24 27.3,23.5 38.42,23.5 42.42,27.5 42.42,32.19
DRAIN-M3
  Top 0.406: U3.6 22.22,54.61 22.54,54.93 24.45,54.93 24.77,54.61 U3.8 24.77,51.44 25.4,50.8 29.46,50.8 31.24,49.02 | 31.24,49.02 31.88,48.39 | 31.88,48.39 Q3.TAB | 31.56,49.34 31.24,49.02 | C.17.2 31.06,48.31 31.43,47.94 31.88,48.39
  pour Top (no thermals): 39.37,53.02 27.3,53.02 27.3,41.27 38.42,41.27 42.42,45.28 42.42,49.97
DRAIN-M4
  Top 0.406: U4.6 22.22,72.39 22.54,72.71 24.45,72.71 24.77,72.39 U4.8 24.77,69.53 25.4,68.9 28.26,68.9 28.57,69.22 28.83,69.22 31.06,66.98 | Q4.TAB 31.08,66.96 31.06,66.98 | C.18.2 31.06,66.98
  pour Top (no thermals): 39.37,70.8 27.3,70.8 27.3,59.05 38.42,59.05 42.42,63.06 42.42,67.75
DRAIN-M5
  Top 0.406: U5.6 22.22,90.17 22.54,90.49 24.45,90.49 24.77,90.17 U5.8 24.77,87.31 25.4,86.68 29.15,86.68 29.5,86.33 | 29.5,86.33 31.06,84.76 | Q5.TAB 31.08,84.74 31.06,84.76 | 31.56,88.39 29.5,86.33 | C.19.2 31.06,84.76
  pour Top (no thermals): 39.37,88.58 27.3,88.58 27.3,76.83 38.42,76.83 42.42,80.84 42.42,85.53
DRAIN-M6
  Top 0.406: U6.6 22.22,107.95 22.54,108.27 24.45,108.27 24.77,107.95 U6.8 24.77,105.09 25.4,104.46 28.26,104.46 28.7,104.9 | 28.7,104.9 28.25,105.35 28.57,105.67 28.57,105.73 28.26,106.05 | 28.7,104.9 Q6.TAB | C.20.2 31.06,106.42 31.75,105.73
  pour Top (no thermals): 39.37,106.36 27.3,106.36 27.3,94.61 38.42,94.61 42.42,98.62 42.42,103.31
DRAIN-M7
  Top 0.406: U7.6 23.18,126.05 23.49,126.36 25.4,126.36 25.72,126.05 U7.8 25.72,123.19 26.35,122.56 28.26,122.56 | 28.25,123.45 Q7.TAB | 32.2,122.42 31.75,123.19 31.7,123.24 C.21.2 | 28.57,124.14 28.89,123.83
  pour Top (no thermals): 39.37,124.46 27.3,124.46 27.3,112.71 38.42,112.71 42.42,116.71 42.42,121.41
EXTRA-CTL
  Top 0.406: 123.19,149.54 123.02,149.38 R.20.2 122.87,151.45 U$1.PH3
FAN_CTL_1
  Top 0.406: Q13.1 76.5,202.36 75.44,201.29 63.12,201.29 62.1,200.28 62.1,199.52 U$1.PD2
FILTER-M1
  Top 0.406: U8.6 42.23,4.45 40.96,3.17 C.1.1
FILTER-M2
  Top 0.406: C.2.1 40.96,20.64 42.23,21.91 U9.6
FILTER-M3
  Top 0.406: C.3.1 40.96,38.42 42.23,39.69 U10.6
FILTER-M4
  Top 0.406: C.4.1 40.96,56.2 42.23,57.47 U11.6
FILTER-M5
  Top 0.406: C.5.1 40.96,73.98 42.23,75.25 U12.6
FILTER-M6
  Top 0.406: C.6.1 40.64,91.44 42.23,93.03 U13.6
FILTER-M7
  Top 0.406: C.7.1 40.32,109.54 42.23,111.44 U14.6
GATE-M1
  Top 0.406: 21.59,14.61 21.27,14.61 21.27,14.92 | 21.59,14.61 21.59,13.97 | 21.59,14.61 22.48,14.61 Q1.1 | 20.95,14.92 21.27,14.92 | U1.5 20.95,15.24 21.27,14.92
GATE-M2
  Top 0.406: U2.5 20.95,32.38 21.91,31.43 22.16,31.43 Q2.1
GATE-M3
  Top 0.406: U3.5 20.95,50.16 21.59,49.53 Q3.1
GATE-M4
  Top 0.406: U4.5 20.95,67.94 21.59,67.31 Q4.1
GATE-M5
  Top 0.406: U5.5 20.95,85.72 21.27,85.41 22.16,85.41 Q5.1
GATE-M6
  Top 0.406: Q6.1 21.59,102.87 20.95,103.5 U6.5
GATE-M7
  Top 0.406: 20.95,120.97 21.27,120.65 21.59,120.65 | 21.59,120.65 22.16,120.65 Q7.1 | U7.5 21.91,120.97 21.59,120.65
GND  (via drill 0.6)
  Top 0.406: 78.42,146.69 78.57,146.53 R.17.1 v79.06,144.78 | C.48.2 v49.21,149.86 | U14.5 40.96,112.08 40.32,111.44 v37.46,111.44 36.56,110.54 C.7.2 36.51,109.48 36.51,108.9 37.15,108.27 39.05,108.27 41.86,105.46 C.14.1 | LED-7.C 15.15,112.62 16.19,113.67 23.81,113.67 24.77,112.71 U6.1 24.77,110.17 25.4,109.54 v26.99,109.54 C.20.1 | U7.1 25.72,127.64 26.35,127 v26.99,127 C.21.1 | LED-6.C 14.92,94.61 15.88,95.57 24.13,95.57 24.77,94.93 U5.1 24.77,92.08 25.4,91.44 v26.99,91.44 C.19.1 | LED-5.C 14.92,76.83 15.88,77.79 24.13,77.79 24.77,77.15 U4.1 24.77,74.61 25.4,73.98 v26.99,73.98 C.18.1 | LED-4.C 14.92,59.05 15.88,60.01 24.13,60.01 24.77,59.37 U3.1 24.77,56.83 25.4,56.2 v26.99,56.2 C.17.1 | LED-3.C 14.92,41.27 15.88,42.23 24.13,42.23 24.77,41.59 U2.1 24.77,39.05 25.4,38.42 v26.99,38.42 C.16.1 | LED-2.C 14.92,23.5 16.19,24.77 24.13,24.77 24.77,24.13 U1.1 24.77,21.27 25.4,20.64 v26.99,20.64 C.15.1 | U13.5 40.96,93.98 40.32,93.34 v37.46,93.34 36.56,92.44 C.6.2 36.51,91.39 36.51,90.81 37.15,90.17 39.37,90.17 41.86,87.68 C.13.1 | U12.5 40.96,76.2 40.32,75.56 v37.46,75.56 36.56,74.67 C.5.2 36.51,73.92 36.51,73.34 37.15,72.71 39.05,72.71 41.86,69.9 C.12.1 | U11.5 40.96,58.42 40.32,57.78 v37.46,57.78 36.56,56.88 C.4.2 36.51,56.15 36.51,55.56 37.15,54.93 39.37,54.93 42.17,52.12 C.11.1 | U10.5 40.96,40.64 40.32,40.01 v37.46,40.01 36.56,39.1 C.3.2 36.51,38.37 36.51,37.78 37.15,37.15 39.37,37.15 42.17,34.34 C.10.1 | U9.5 40.96,22.86 40.32,22.23 v37.46,22.23 36.56,21.32 C.2.2 36.51,20.59 36.51,20 37.15,19.37 39.37,19.37 42.17,16.56 C.9.1 | LED-1.C 22.95,5.95 23.18,5.71 v24.45,5.71
  Top 0.406: 156.84,56.2 156.61,55.97 LED-9.C 156.61,55.65 156.53,55.56 v156.53,54.29 | LED-8.C 156.61,15.47 156.53,15.56 v156.53,13.65 | U19.5 146.31,171.51 145.41,172.4 140.65,172.4 140.07,171.82 C.40.2 140.07,167.38 v140.02,167.32 140.07,167.27 C.24.1 | LED-11.C 156.61,179.94 156.84,179.71 156.84,180.02 156.53,180.34 v156.53,181.61 | Q13.2 77.79,202.56 v79.06,202.56 | U8.5 40.96,5.4 40.32,4.76 v37.46,4.76 36.56,3.86 C.1.2 36.51,3.12 36.51,2.54 37.15,1.91 47.62,1.91 48.21,2.49 C.8.1 | LED-10.C 156.61,96.29 156.53,96.2 v156.53,94.93 | Q12.2 88.6,148.92 v89.54,149.86 91.12,149.86 91.29,149.69 R.14.2 | R.19.2 104.94,149.38 104.78,149.86 v103.19,149.86 102.83,149.54 Q8.2 | 118.11,149.54 118.28,149.38 R.21.2 118.58,149.86 v115.89,149.86 115.23,149.2 Q9.2 | C.34.2 v152.08,41.27 | C.35.2 v152.08,81.92 | C.37.2 139.19,123.06 v140.97,121.28 U15.1 | C.23.1 159.38,68.53 v159.38,66.67 159.33,66.62 C.39.2 159.38,64.72 159.38,64.14 158.75,63.5 156.21,63.5 154.3,65.41 U18.5 | C.22.1 159.38,28.2 v159.38,26.04 159.33,25.98 C.38.2 159.38,24.08 159.38,23.5 158.75,22.86 154.94,22.86 153.73,24.07 U17.5 | U16.1 147.95,162.56 148.59,161.93 148.59,158.12 147.95,157.48 v142.88,157.48 141.92,157.48 141.29,156.84 C.36.2 | U21.15 112.4,174.11 | 112.4,174.11 C.55.2 | C.58.2 114.57,186.57 115.32,187.32 v115.32,188.09 | v107.32,189.61 C.59.2 | 112.4,174.11 112.4,173.99 v111,173.99 | C.41.2 155.84,105.53 | U20.5 151.26,106.05 153.16,104.14 155.19,104.14 155.96,104.9 155.96,105.29 C.41.2 | 157.23,109.61 C.25.1 155.45,108.07 v155.45,107.82 155.45,106.17 155.84,105.78 C.41.2
  other vias: 104.14,11.43 104.14,10.16 104.14,8.89 104.14,7.62 104.14,6.35 62.55,149.86 46.67,149.86 51.75,149.86 58.42,149.86 66.04,149.86
  pour Bottom-GND: 168.91,-5.08 1.27,-6.35 0,212.09 168.91,212.09
  pour Top (no thermals): 101.6,12.7 101.6,5.08 104.46,5.08 104.46,12.7
  pour Top (no thermals): 41.27,148.59 69.22,148.59 69.85,149.22 69.85,149.54 69.22,150.18 41.27,150.18 40.64,149.54 40.64,149.22
IMEAS-ACT  (via drill 0.6)
  Top 0.406: v151.13,67.31 151.76,67.94 U18.7
  Bot-Mid(sig) 0.406: U$1.PE2 119.38,195.58 119.38,81.28 133.35,67.31 v151.13,67.31
IMEAS-COM  (via drill 0.6)
  Top 0.406: U19.7 v142.56,168.28
  Bot-Mid(sig) 0.406: v142.56,168.28 132.72,168.28 123.19,177.8 U$1.PE0
IMEAS-EXTRA  (via drill 0.6)
  Top 0.406: v151.13,26.67 151.76,27.3 U17.7
  Bot-Mid(sig) 0.406: U$1.PE3 116.84,195.58 116.84,43.18 133.35,26.67 v151.13,26.67
IMEAS-LOGIC  (via drill 0.6)
  Top 0.406: v148.59,107.95 149.1,108.46 151.06,108.46 U20.7
  Bot-Mid(sig) 0.406: v148.59,107.95 133.35,107.95 121.92,119.38 121.92,195.58 U$1.PE1
IMEAS-M1  (via drill 0.6)
  Top 0.406: v43.18,3.17 43.5,3.49 U8.7
  Bot-Mid(sig) 0.406: U$1.PK3 44.45,194.31 36.83,194.31 27.94,185.42 27.94,16.51 41.27,3.17 v43.18,3.17
IMEAS-M2  (via drill 0.6)
  Top 0.406: v43.18,20.64 43.5,20.95 U9.7
  Bot-Mid(sig) 0.406: U$1.PK2 46.04,193.36 37.46,193.36 28.89,184.78 28.89,32.7 40.96,20.64 v43.18,20.64
IMEAS-M3  (via drill 0.6)
  Top 0.406: v43.18,38.42 43.5,38.73 U10.7
  Bot-Mid(sig) 0.406: U$1.PK1 47.62,192.41 38.1,192.41 29.84,184.15 29.84,49.53 40.96,38.42 v43.18,38.42
IMEAS-M4  (via drill 0.6)
  Top 0.406: v43.18,56.2 43.5,56.52 U11.7
  Bot-Mid(sig) 0.406: U$1.PD4 53.34,198.12 53.34,195.58 49.21,191.45 38.73,191.45 30.8,183.51 30.8,66.36 40.96,56.2 v43.18,56.2
IMEAS-M5  (via drill 0.6)
  Top 0.406: v43.18,73.98 43.5,74.3 U12.7
  Bot-Mid(sig) 0.406: U$1.PK0 54.61,194.31 50.8,190.5 39.37,190.5 31.75,182.88 31.75,83.19 40.96,73.98 v43.18,73.98
IMEAS-M6  (via drill 0.6)
  Top 0.406: v43.18,91.76 43.5,92.08 U13.7
  Bot-Mid(sig) 0.406: U$1.PB5 57.15,194.31 52.39,189.55 40.01,189.55 32.7,182.25 32.7,100.01 40.96,91.76 v43.18,91.76
IMEAS-M7  (via drill 0.6)
  Top 0.406: v43.18,109.54 43.5,109.86 U14.7
  Bot-Mid(sig) 0.406: U$1.PB4 59.69,194.31 53.98,188.59 40.64,188.59 33.66,181.61 33.66,117.16 41.27,109.54 v43.18,109.54
LEDLINE-M1
  Top 0.406: R.1.2 22.76,3.04 LED-1.A
LEDLINE-M2
  Top 0.406: R.2.2 14.82,20.51 LED-2.A
LEDLINE-M3
  Top 0.406: R.3.2 14.82,38.29 LED-3.A
LEDLINE-M4
  Top 0.406: R.4.2 14.82,56.07 LED-4.A
LEDLINE-M5
  Top 0.406: R.5.2 14.82,73.85 LED-5.A
LEDLINE-M6
  Top 0.406: R.6.2 14.82,91.63 LED-6.A
LEDLINE-M7
  Top 0.406: LED-7.A 11.21,109.62 R.7.2
LOGIC-SIG
  Top 0.406: U15.4 137.16,120.02 127.64,129.54 127.64,149.22 U$1.PH2
N$1
  pour Top (no thermals): 162.56,91.44 164.15,89.85 164.15,87 162.56,85.41 132.4,85.41 129.22,88.58 129.22,93.03 130.81,94.61 134.62,94.61 137.79,91.44
N$2
  pour Top (no thermals): 162.56,37.47 163.83,36.2 164.47,35.56 164.47,33.02 162.56,31.11 153.8,31.11 149.86,27.18 144.14,27.18 144.14,33.02 144.14,34.92 146.69,37.47
N$3  (via drill 0.6)
  Top 0.406: Q12.3 86.68,147.96 85.41,146.69 v85.41,143.51
  Bot-Mid(sig) 0.406: v85.41,143.51 85.41,127.95 MARLIN-12V.2
N$4
  Top 0.406: U20.6 152.13,107.31 C.41.1
N$5  (via drill 0.6)
  Top 0.406: Q9.3 113.35,147.96 112.08,146.69 v112.08,143.51
  Bot-Mid(sig) 0.406: v112.08,143.51 112.08,52.7 105.09,45.72 DORY-12V.2
N$6
  Top 0.406: R.9.2 159.51,55.98 LED-9.A
N$7
  Top 0.406: R.11.2 159.51,179.92 LED-11.A
N$8  (via drill 0.6)
  Top 0.406: Q8.3 100.01,147.96 98.74,146.69 v98.74,143.51
  Bot-Mid(sig) 0.406: v98.74,143.51 98.74,90.81 92.39,84.45 NEMO-12V.2
N$9
  pour Top (no thermals): 131.76,133.67 150.5,133.67 152.72,131.44 152.72,122.24 150.5,120.02 144.46,120.02 137.16,127.32 131.44,127.32 129.22,129.54 129.22,132.4 130.49,133.67
  pour Top (no thermals): 129.22,129.54 129.22,140.65 145.1,156.53 149.86,156.53 151.13,155.26 153.03,153.35 153.03,144.46 151.45,142.88 140.97,142.88 135.89,137.79 135.89,129.54
N$10
  Top 0.406: C.38.1 157.48,24.13 155.57,26.04 U17.6
N$11
  Top 0.406: C.58.1 112.77,186.17 112.4,185.8 U21.2
N$12
  Top 0.406: U18.6 155.63,66.67 C.39.1
N$15
  Top 0.406: C.40.1 142.24,170.81 143.51,169.54 U19.6
N$16
  Top 0.406: R.10.2 159.51,96.62 LED-10.A
N$17
  Top 0.406: U16.5 153.03,158.75 153.67,159.38 153.67,161.93 155.89,164.15 159.7,164.15 161.29,165.74 161.29,166.66 Q11.1
N$18
  pour Top (no thermals): 162.56,78.11 163.83,76.83 164.47,76.2 164.47,73.66 162.56,71.75 153.8,71.75 149.86,67.82 144.14,67.82 144.14,73.66 144.14,75.56 146.69,78.11
N$19
  pour Top (no thermals): 150.18,168.47 157.16,168.47 157.8,167.83 157.8,165.74 157.16,165.1 150.81,165.1 150.18,165.74
N$20
  Top 0.406: U16.8 150.11,162.56 149.48,161.93 149.48,159.38 | 149.48,159.38 149.48,158.12 150.11,157.48 156.21,157.48 Q11.4 | U16.6 150.11,160.02 149.48,159.38
  pour Top (no thermals): 160.66,163.51 162.56,163.51 164.15,161.93 164.15,149.54 162.56,147.96 160.02,147.96 154.94,153.03 154.94,161.93 156.53,163.51
N$21
  Top 0.406: U15.6 138.43,114.94 139.06,115.57 141.73,115.57 | 141.73,115.57 155.58,115.57 Q10.4 | U15.8 140.97,114.81 141.73,115.57
  pour Top (no thermals): 153.99,111.76 162.56,111.76 164.15,113.35 164.15,126.36 162.56,127.95 159.38,127.95 158.11,126.68 158.11,122.24 153.03,117.16 153.03,112.71
N$22
  pour Top (no thermals): 147.32,108.46 149.86,111 151.38,111 152.15,111.76 152.15,113.54 151.38,114.3 143.26,114.3 142.24,113.28 142.24,108.46
N$23
  pour Top (no thermals): 130.81,55.88 133.03,55.88 138.11,50.8 162.56,50.8 164.15,49.21 164.15,46.35 162.56,44.77 134.94,44.77 129.22,50.48 129.22,54.29
N$25
  Top 0.406: R.18.1 R.19.1 104.93,146.37 102.87,146.37 101.93,147.31 Q8.1
N$27
  Top 0.406: Q9.1 115.27,147.31 116.21,146.37 118.26,146.37 R.21.1 118.59,146.37 122.56,146.37 122.72,146.53 R.20.1
N$28
  Top 0.406: U15.5 137.16,114.94 138.43,116.2 148.3,116.2 Q10.1
N$40
  Top 0.406: C.56.1 113.68,183.05 U21.1
N$42
  Top 0.406: C.56.2 111.76,189.36 111.12,188.72 U21.3
N$43
  Top 0.406: C.57.1 U21.4
N$44
  Top 0.406: C.57.2 109.1,187.97 108.59,187.45 U21.5
N$45
  Top 0.406: C.59.1 U21.6
N$46
  Top 0.406: LED-8.A 159.61,18.63 R.8.2
N$66
  Top 0.406: Q13.3 77.15,204.53 77.22,204.6 77.22,204.98 77.6,205.36 81.85,205.36 X1.1
N$114
  Top 0.406: R.15.1 R.14.1 91.59,146.37 89.54,146.37 88.6,147.31 Q12.1
SER_RX
  Top 0.406: U$1.PC4 121.92,198.12 121.92,185.42 116.21,179.71 109.22,179.71 108.59,179.07 U21.12
SER_TX
  Top 0.406: U$1.PC5 119.38,198.12 119.38,184.78 115.57,180.97 108.59,180.97 107.32,179.71 U21.11
SIG-M1  (via drill 0.6)
  Top 0.406: U1.4 20.95,21.27 v21.59,20.64
  Top-Mid(3.3) 0.406: v21.59,20.64 24.13,20.64 33.66,30.16 33.66,141.6 39.69,147.64 53.66,147.64 U$1.PP5
SIG-M2  (via drill 0.6)
  Top 0.406: U2.4 20.95,38.73 v21.59,38.1
  Top-Mid(3.3) 0.406: v21.59,38.1 23.81,38.1 32.7,46.99 32.7,141.92 39.37,148.59 52.07,148.59 U$1.PA7
SIG-M3  (via drill 0.6)
  Top 0.406: U3.4 20.95,56.52 v21.59,55.88
  Top-Mid(3.3) 0.406: U$1.PH0 48.26,154.94 48.26,153.03 44.77,149.54 39.05,149.54 31.75,142.24 31.75,63.18 24.45,55.88 v21.59,55.88
SIG-M4  (via drill 0.6)
  Top 0.406: U4.4 20.95,74.3 v21.59,73.66
  Top-Mid(3.3) 0.406: U$1.PP3 46.99,153.03 44.45,150.5 38.73,150.5 30.8,142.56 30.8,80.01 24.45,73.66 v21.59,73.66
SIG-M5  (via drill 0.6)
  Top 0.406: U5.4 20.95,92.08 v21.59,91.44
  Top-Mid(3.3) 0.406: U$1.PH1 45.72,154.94 45.72,153.03 44.13,151.45 38.42,151.45 29.84,142.88 29.84,96.84 24.45,91.44 v21.59,91.44
SIG-M6  (via drill 0.6)
  Top 0.406: U6.4 20.95,109.86 v21.59,109.22
  Top-Mid(3.3) 0.406: U$1.PK6 43.18,154.94 38.1,154.94 28.89,145.73 28.89,113.67 24.45,109.22 v21.59,109.22
SIG-M7  (via drill 0.6)
  Top 0.406: U7.4 21.91,127.95 v22.54,127.32
  Top-Mid(3.3) 0.406: U$1.PK7 37.78,156.21 27.94,146.37 27.94,130.49 24.77,127.32 v22.54,127.32
SOURCE-M1
  Top 0.406: R.1.1 19.05,8.89 22.16,8.89 Q1.2
  pour Top (no thermals): 14.92,17.46 10.16,17.46 8.57,15.88 8.57,11.75 12.38,7.94 24.77,7.94 24.77,12.7 17.46,12.7 16.51,13.65 16.51,15.88
SOURCE-M2
  Top 0.406: R.2.1 11.11,25.08 13.34,27.3 13.34,30.29 U$23.VCC
  pour Top (no thermals): 14.92,34.92 10.16,34.92 8.57,33.34 8.57,29.21 12.38,25.4 24.77,25.4 24.77,30.16 17.46,30.16 16.51,31.11 16.51,33.34
SOURCE-M3
  Top 0.406: R.3.1 11.11,42.55 13.02,44.45 13.02,48.39 U$7.VCC
  pour Top (no thermals): 14.92,52.7 10.16,52.7 8.57,51.12 8.57,46.99 12.38,43.18 24.77,43.18 24.77,47.94 17.46,47.94 16.51,48.9 16.51,51.12
SOURCE-M4
  Top 0.406: R.4.1 11.11,60.33 12.7,61.91 12.7,66.48 U$15.VCC
  pour Top (no thermals): 14.92,70.48 10.16,70.48 8.57,68.9 8.57,64.77 12.38,60.96 24.77,60.96 24.77,65.72 17.46,65.72 16.51,66.67 16.51,68.9
SOURCE-M5
  Top 0.406: R.5.1 11.11,78.42 12.7,80.01 12.7,84.26 U$19.VCC
  pour Top (no thermals): 14.92,88.27 10.16,88.27 8.57,86.68 8.57,82.55 12.38,78.74 24.77,78.74 24.77,83.5 17.46,83.5 16.51,84.45 16.51,86.68
SOURCE-M6
  Top 0.406: R.6.1 11.11,96.2 12.07,97.16 12.07,102.17 U$20.VCC
  pour Top (no thermals): 14.92,106.05 10.16,106.05 8.57,104.46 8.57,100.33 12.38,96.52 24.77,96.52 24.77,101.28 17.46,101.28 16.51,102.23 16.51,104.46
SOURCE-M7
  Top 0.406: R.7.1 11.11,113.98 12.38,115.25 12.38,120.46 U$22.VCC
  pour Top (no thermals): 14.92,124.14 10.16,124.14 8.57,122.56 8.57,118.43 12.38,114.62 24.77,114.62 24.77,119.38 17.46,119.38 16.51,120.33 16.51,122.56
V_BATT
  Top 1.27: R.16.2 74.93,134.94
  pour Top-Mid(3.3) (isolate 1.27, no thermals): 122.24,135.57 55.56,135.57 55.56,7.62 58.42,4.76 97.47,4.76 100.33,7.62 100.33,24.45 102.87,26.99 122.24,26.99 125.1,29.84 125.1,132.72
  pour Top (no thermals): 64.45,135.57 41.27,135.57 40.64,134.94 40.64,133.99 41.27,133.35 52.7,133.35 64.45,121.6
  pour Top-Mid(3.3) (isolate 0.889, no thermals): 55.56,135.57 41.27,135.57 40.64,134.94 40.64,133.99 41.27,133.35 52.7,133.35 55.56,130.49
  pour Top (no thermals): 100.46,24.51 100.33,24.38 100.33,4.19 97.54,1.4 58.17,1.4 55.5,4.06 55.5,27.05 103,27.05
  pour Top (isolate 1.27, no thermals): 122.17,26.92 55.5,26.92 55.5,135.64 122.17,135.64 125.1,132.72 125.1,29.84
V_BATT_M1
  pour Top (no thermals): 43.31,14.29 50.16,14.29 52.07,12.38 52.07,6.67 50.8,5.08 47.94,5.08 46.35,6.67 46.35,8.89 45.4,9.84 43.31,9.84
V_BATT_M2
  pour Top (no thermals): 43.31,27.3 43.31,32.07 46.04,32.07 46.67,32.7 46.67,35.56 47.31,36.2 51.12,36.2 51.75,35.56 51.75,27.94 51.12,27.3
V_BATT_M3
  pour Top (no thermals): 43.31,45.21 45.59,45.21 46.67,44.13 46.67,39.69 47.31,39.05 51.12,39.05 51.75,39.69 51.75,47.62 49.53,49.85 43.31,49.85
V_BATT_M4
  pour Top (no thermals): 43.31,62.99 43.31,67.63 46.04,67.63 46.67,68.26 46.67,69.85 47.31,70.48 51.12,70.48 51.75,69.85 51.75,63.63 51.12,62.99
V_BATT_M5
  pour Top (no thermals): 43.31,80.77 45.91,80.77 46.67,80.01 46.67,73.98 47.31,73.34 51.12,73.34 51.75,73.98 51.75,83.19 49.53,85.41 43.31,85.41
V_BATT_M6
  pour Top (no thermals): 43.31,98.55 45.91,98.55 47.62,96.84 51.44,96.84 52.07,97.47 52.07,104.14 51.44,104.78 47.62,104.78 46.04,103.19 43.31,103.19
V_BATT_M7
  pour Top (no thermals): 43.31,116.65 45.91,116.65 46.99,115.57 46.99,108.27 47.94,107.31 51.44,107.31 52.07,107.95 52.07,118.43 49.21,121.28 43.31,121.28
VMEAS-VBATT  (via drill 0.6)
  Top 0.406: R.16.1 R.17.2 76.99,149.38 v76.99,152.56
  Bot-Mid(sig) 0.406: U$1.PE5 114.3,198.12 114.3,196.22 112.4,194.31 86.04,194.31 76.99,185.26 v76.99,152.56

## Text on the board
Bottom-GND: | | |
tPlace: FAN_5V | 5V | X1 | Q13 | C56 | C57 | C59 | C58 | | | U21 | LED11 | | | R11 | Missouri S&T / Mars Rover Design Team / Power Board 2017 Rev2 / Jacob Lipina | COM | | | C55 | U19 | C40 | C24 | U16 | Q11 | C36 | FUSE_BLOCK | 5A | C45 | C42 | C48 | C46 | C43 | C49 | R16 | R17 | Q12 | R14 | R15 | Q8 | R19 | R18 | Q9 | R21 | R20 | C28 | C29 | #R VE / SOHARD | 5A | 5V-OKI | 3.3V-OKI | C31 | C30 | U7 | C21 | C54 | FUSE_BLOCK | C37 | Q7 | U14 | Q10 | 30A | FUSE_BLOCK | U15 | U6 | C25 | M7 | C20 | C7 | U20 | R7 | LED7 | C14 | C41 | Q6 | FUSE_BLOCK | 30A | R10 | U13 | LED10 | LOGIC | U5 | M6 | C53 | C19 | C6 | R6 | LED6 | 15A | C13 | FUSE_BLOCK | Q5 | U12 | C26 | 30A | FUSE_BLOCK | C27 | C35 | U4 | M5 | C18 | C5 | R5 | LED5 | C12 | Q4 | 30A | U18 | C23 | FUSE_BLOCK | U11 | C39 | R9 | LED9 | M4 | U3 | C52 | R4 | LED4 | C17 | C4 | C11 | ACTUATION | Q3 | 15A | U10 | FUSE_BLOCK | 30A | FUSE_BLOCK | C32 | U2 | M3 | C16 | C3 | C33 | R3 | LED3 | C10 | C34 | 30A | FUSE_BLOCK | Q2 | U9 | U17 | C22 | C51 | C38 | U1 | M2 | R8 | D2 | C15 | C2 | R2 | LED2 | C9 | LED8 | Q1 | D1 | U8 | C47 | EXTRA-12V | FUSE_BLOCK | C44 | C50 | 30A | M1 | C1 | C8 | R1 | LED1 | + | -